# EAGLE board Qwiic Environmental BME680-Panel (EAGLE 9.6.0), part 1 of 4
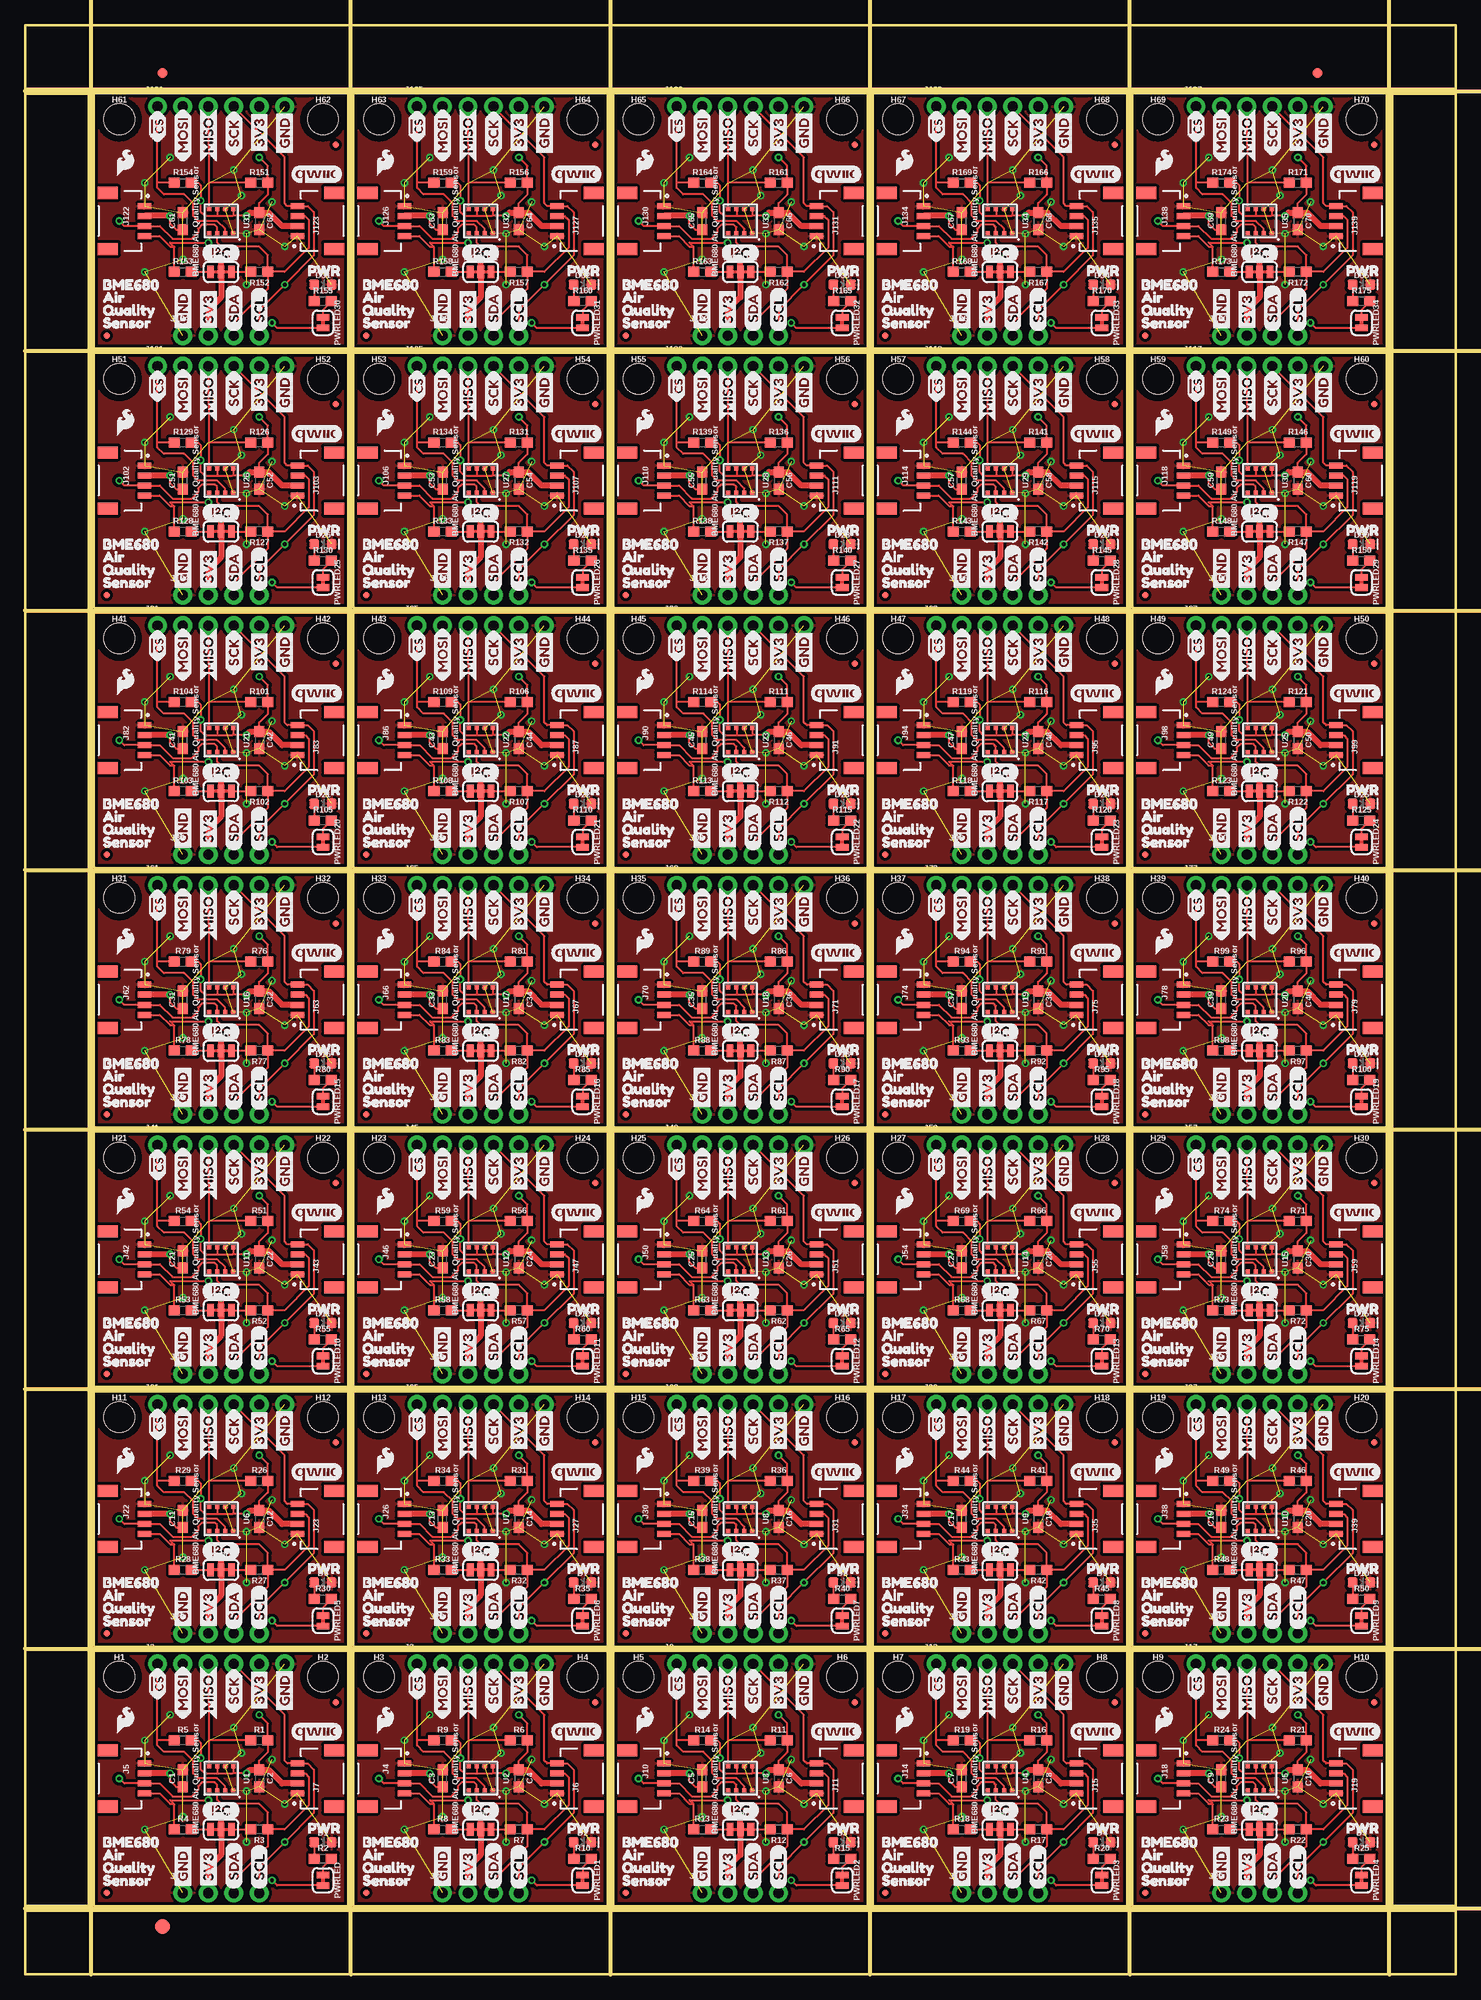
[diagram p0: board, top side]
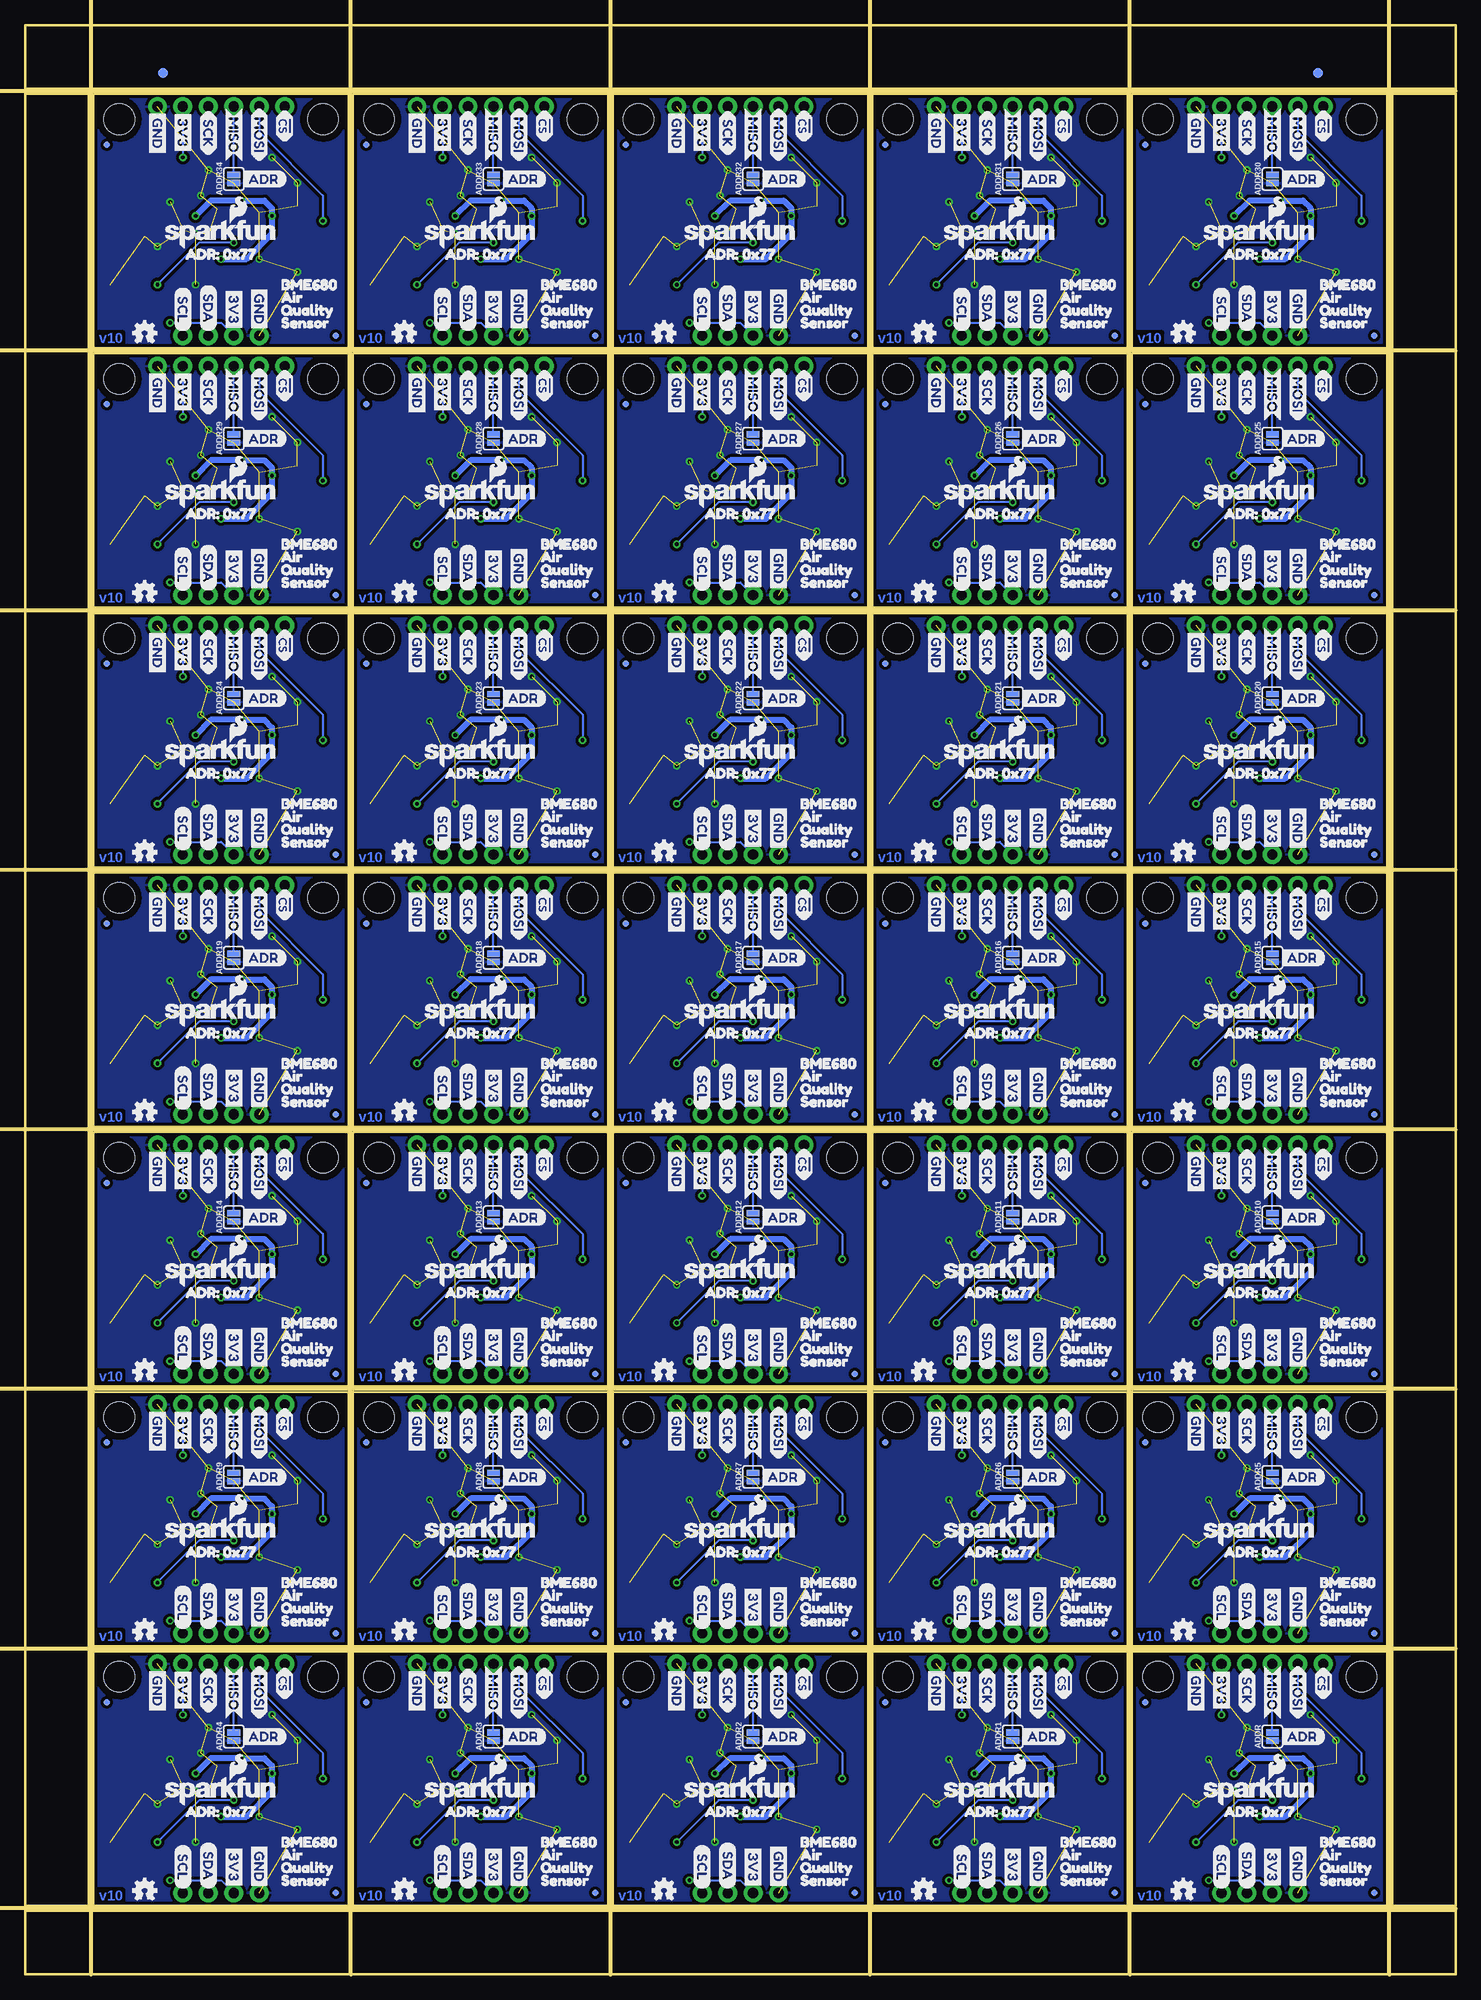
[diagram p1: board, bottom side, seen from below]

Size 142.75 x 194.56 mm. Coordinates in mm from the lower left corner, seen from the top.
Outline: 6.86,6.86 32.26,6.86 32.26,32.26 6.86,32.26 6.86,6.86
Outline: 32.77,6.86 58.17,6.86 58.17,32.26 32.77,32.26 32.77,6.86
Outline: 58.67,6.86 84.07,6.86 84.07,32.26 58.67,32.26 58.67,6.86
Outline: 84.58,6.86 109.98,6.86 109.98,32.26 84.58,32.26 84.58,6.86
Outline: 110.49,6.86 135.89,6.86 135.89,32.26 110.49,32.26 110.49,6.86
Outline: 6.86,32.77 32.26,32.77 32.26,58.17 6.86,58.17 6.86,32.77
Outline: 32.77,32.77 58.17,32.77 58.17,58.17 32.77,58.17 32.77,32.77
Outline: 58.67,32.77 84.07,32.77 84.07,58.17 58.67,58.17 58.67,32.77
Outline: 84.58,32.77 109.98,32.77 109.98,58.17 84.58,58.17 84.58,32.77
Outline: 110.49,32.77 135.89,32.77 135.89,58.17 110.49,58.17 110.49,32.77
Outline: 6.86,58.67 32.26,58.67 32.26,84.07 6.86,84.07 6.86,58.67
Outline: 32.77,58.67 58.17,58.67 58.17,84.07 32.77,84.07 32.77,58.67
Outline: 58.67,58.67 84.07,58.67 84.07,84.07 58.67,84.07 58.67,58.67
Outline: 84.58,58.67 109.98,58.67 109.98,84.07 84.58,84.07 84.58,58.67
Outline: 110.49,58.67 135.89,58.67 135.89,84.07 110.49,84.07 110.49,58.67
Outline: 6.86,84.58 32.26,84.58 32.26,109.98 6.86,109.98 6.86,84.58
Outline: 32.77,84.58 58.17,84.58 58.17,109.98 32.77,109.98 32.77,84.58
Outline: 58.67,84.58 84.07,84.58 84.07,109.98 58.67,109.98 58.67,84.58
Outline: 84.58,84.58 109.98,84.58 109.98,109.98 84.58,109.98 84.58,84.58
Outline: 110.49,84.58 135.89,84.58 135.89,109.98 110.49,109.98 110.49,84.58
Outline: 6.86,110.49 32.26,110.49 32.26,135.89 6.86,135.89 6.86,110.49
Outline: 32.77,110.49 58.17,110.49 58.17,135.89 32.77,135.89 32.77,110.49
Outline: 58.67,110.49 84.07,110.49 84.07,135.89 58.67,135.89 58.67,110.49
Outline: 84.58,110.49 109.98,110.49 109.98,135.89 84.58,135.89 84.58,110.49
Outline: 110.49,110.49 135.89,110.49 135.89,135.89 110.49,135.89 110.49,110.49
Outline: 6.86,136.4 32.26,136.4 32.26,161.8 6.86,161.8 6.86,136.4
Outline: 32.77,136.4 58.17,136.4 58.17,161.8 32.77,161.8 32.77,136.4
Outline: 58.67,136.4 84.07,136.4 84.07,161.8 58.67,161.8 58.67,136.4
Outline: 84.58,136.4 109.98,136.4 109.98,161.8 84.58,161.8 84.58,136.4
Outline: 110.49,136.4 135.89,136.4 135.89,161.8 110.49,161.8 110.49,136.4
Outline: 6.86,162.31 32.26,162.31 32.26,187.71 6.86,187.71 6.86,162.31
Outline: 32.77,162.31 58.17,162.31 58.17,187.71 32.77,187.71 32.77,162.31
Outline: 58.67,162.31 84.07,162.31 84.07,187.71 58.67,187.71 58.67,162.31
Outline: 84.58,162.31 109.98,162.31 109.98,187.71 84.58,187.71 84.58,162.31
Outline: 110.49,162.31 135.89,162.31 135.89,187.71 110.49,187.71 110.49,162.31
Outline: 0,6.35 142.75,6.35 142.75,0 0,0 0,6.35
Outline: 136.4,187.71 142.75,187.71 142.75,6.86 136.4,6.86 136.4,187.71
Outline: 0,194.56 142.75,194.56 142.75,188.21 0,188.21 0,194.56
Outline: 0,187.71 6.35,187.71 6.35,6.86 0,6.86 0,187.71
Copper layers (1*16): Top 0.035mm / dielectric 1.5mm / Bottom 0.035mm
Design rules "Qwiic": minimum track width 7mil, minimum drill 15mil, track to track 7mil, track to pad 7mil, pad to pad 7mil, via to via 7mil, smd to smd 7mil, copper to edge 7mil, drill to drill 7mil, minimum pad ring 7mil, minimum via ring 7mil, stop-mask expansion 4mil, vias tented up to drill 25mil, thermal gap 10mil
Milling: 14 lines

## Footprints (pad centres in the part's own frame; a part is rotated, then mirrored left to right if it is on the bottom)
SMT-JUMPER_2_NO_SILK = smd 0.635 x 1.27: 1 -0.406,0; 2 0.406,0
0603 = smd 1.1 x 1: 1 -0.85,0; 2 0.85,0
LED-0603 = smd 1 x 1: A -0.877,0; C 0.877,0
FIDUCIAL-1X2 = smd 1 x 1: 1 0,0
FIDUCIAL-1.5X3 = smd 1.5 x 1.5: 1 0,0
FIDUCIAL-MICRO = smd 0.635 x 0.635: 1 0,0
STAND-OFF-TIGHT = hole 3.048: 0,0
SMT-JUMPER_3_2-NC_TRACE_SILK = smd 0.66 x 1.27: 1 -1.041,0; 2 0,0; 3 1.041,0
1X04_NO_SILK = drill 1.016 pad 1.88: 1 0,0; 2 2.54,0; 3 5.08,0; 4 7.62,0
1X06_NO_SILK = drill 1.016 pad 1.88: 1 0,0; 2 2.54,0; 3 5.08,0; 4 7.62,0; 5 10.16,0; 6 12.7,0
JST04_1MM_RA = smd 0.6 x 1.35: 1 -1.5,0; 2 -0.5,0; 3 0.5,0; 4 1.5,0 | smd 1.2 x 2: NC1 2.8,-3.675; NC2 -2.8,-3.675
SMT-JUMPER_2_NC_TRACE_SILK = smd 0.66 x 1.27: 1 -0.521,0; 2 0.521,0
0603@1 = smd 1.1 x 1: 1 -0.85,0; 2 0.85,0
LGA3.0X3.0 = smd 0.4 x 0.4: 1 1.2,1.2; 2 1.2,0.4; 3 1.2,-0.4; 4 1.2,-1.2; 5 -1.2,-1.2; 6 -1.2,-0.4; 7 -1.2,0.4; 8 -1.2,1.2

## Placement (x,y rotation side)
ADDR  JUMPER-SMT_2_NO_SILK  [SMT-JUMPER_2_NO_SILK]  18.29,23.75 90 bottom
ADDR1  JUMPER-SMT_2_NO_SILK  [SMT-JUMPER_2_NO_SILK]  44.2,23.75 90 bottom
ADDR2  JUMPER-SMT_2_NO_SILK  [SMT-JUMPER_2_NO_SILK]  70.1,23.75 90 bottom
ADDR3  JUMPER-SMT_2_NO_SILK  [SMT-JUMPER_2_NO_SILK]  96.01,23.75 90 bottom
ADDR4  JUMPER-SMT_2_NO_SILK  [SMT-JUMPER_2_NO_SILK]  121.92,23.75 90 bottom
ADDR5  JUMPER-SMT_2_NO_SILK  [SMT-JUMPER_2_NO_SILK]  18.29,49.66 90 bottom
ADDR6  JUMPER-SMT_2_NO_SILK  [SMT-JUMPER_2_NO_SILK]  44.2,49.66 90 bottom
ADDR7  JUMPER-SMT_2_NO_SILK  [SMT-JUMPER_2_NO_SILK]  70.1,49.66 90 bottom
ADDR8  JUMPER-SMT_2_NO_SILK  [SMT-JUMPER_2_NO_SILK]  96.01,49.66 90 bottom
ADDR9  JUMPER-SMT_2_NO_SILK  [SMT-JUMPER_2_NO_SILK]  121.92,49.66 90 bottom
ADDR10  JUMPER-SMT_2_NO_SILK  [SMT-JUMPER_2_NO_SILK]  18.29,75.56 90 bottom
ADDR11  JUMPER-SMT_2_NO_SILK  [SMT-JUMPER_2_NO_SILK]  44.2,75.56 90 bottom
ADDR12  JUMPER-SMT_2_NO_SILK  [SMT-JUMPER_2_NO_SILK]  70.1,75.56 90 bottom
ADDR13  JUMPER-SMT_2_NO_SILK  [SMT-JUMPER_2_NO_SILK]  96.01,75.56 90 bottom
ADDR14  JUMPER-SMT_2_NO_SILK  [SMT-JUMPER_2_NO_SILK]  121.92,75.56 90 bottom
ADDR15  JUMPER-SMT_2_NO_SILK  [SMT-JUMPER_2_NO_SILK]  18.29,101.47 90 bottom
ADDR16  JUMPER-SMT_2_NO_SILK  [SMT-JUMPER_2_NO_SILK]  44.2,101.47 90 bottom
ADDR17  JUMPER-SMT_2_NO_SILK  [SMT-JUMPER_2_NO_SILK]  70.1,101.47 90 bottom
ADDR18  JUMPER-SMT_2_NO_SILK  [SMT-JUMPER_2_NO_SILK]  96.01,101.47 90 bottom
ADDR19  JUMPER-SMT_2_NO_SILK  [SMT-JUMPER_2_NO_SILK]  121.92,101.47 90 bottom
ADDR20  JUMPER-SMT_2_NO_SILK  [SMT-JUMPER_2_NO_SILK]  18.29,127.38 90 bottom
ADDR21  JUMPER-SMT_2_NO_SILK  [SMT-JUMPER_2_NO_SILK]  44.2,127.38 90 bottom
ADDR22  JUMPER-SMT_2_NO_SILK  [SMT-JUMPER_2_NO_SILK]  70.1,127.38 90 bottom
ADDR23  JUMPER-SMT_2_NO_SILK  [SMT-JUMPER_2_NO_SILK]  96.01,127.38 90 bottom
ADDR24  JUMPER-SMT_2_NO_SILK  [SMT-JUMPER_2_NO_SILK]  121.92,127.38 90 bottom
ADDR25  JUMPER-SMT_2_NO_SILK  [SMT-JUMPER_2_NO_SILK]  18.29,153.29 90 bottom
ADDR26  JUMPER-SMT_2_NO_SILK  [SMT-JUMPER_2_NO_SILK]  44.2,153.29 90 bottom
ADDR27  JUMPER-SMT_2_NO_SILK  [SMT-JUMPER_2_NO_SILK]  70.1,153.29 90 bottom
ADDR28  JUMPER-SMT_2_NO_SILK  [SMT-JUMPER_2_NO_SILK]  96.01,153.29 90 bottom
ADDR29  JUMPER-SMT_2_NO_SILK  [SMT-JUMPER_2_NO_SILK]  121.92,153.29 90 bottom
ADDR30  JUMPER-SMT_2_NO_SILK  [SMT-JUMPER_2_NO_SILK]  18.29,179.2 90 bottom
ADDR31  JUMPER-SMT_2_NO_SILK  [SMT-JUMPER_2_NO_SILK]  44.2,179.2 90 bottom
ADDR32  JUMPER-SMT_2_NO_SILK  [SMT-JUMPER_2_NO_SILK]  70.1,179.2 90 bottom
ADDR33  JUMPER-SMT_2_NO_SILK  [SMT-JUMPER_2_NO_SILK]  96.01,179.2 90 bottom
ADDR34  JUMPER-SMT_2_NO_SILK  [SMT-JUMPER_2_NO_SILK]  121.92,179.2 90 bottom
C1  0.1uF  [0603]  15.75,19.56 90 top
C2  0.1uF  [0603]  23.37,19.56 270 top
C3  0.1uF  [0603]  41.66,19.56 90 top
C4  0.1uF  [0603]  49.28,19.56 270 top
C5  0.1uF  [0603]  67.56,19.56 90 top
C6  0.1uF  [0603]  75.18,19.56 270 top
C7  0.1uF  [0603]  93.47,19.56 90 top
C8  0.1uF  [0603]  101.09,19.56 270 top
C9  0.1uF  [0603]  119.38,19.56 90 top
C10  0.1uF  [0603]  127,19.56 270 top
C11  0.1uF  [0603]  15.75,45.47 90 top
C12  0.1uF  [0603]  23.37,45.47 270 top
C13  0.1uF  [0603]  41.66,45.47 90 top
C14  0.1uF  [0603]  49.28,45.47 270 top
C15  0.1uF  [0603]  67.56,45.47 90 top
C16  0.1uF  [0603]  75.18,45.47 270 top
C17  0.1uF  [0603]  93.47,45.47 90 top
C18  0.1uF  [0603]  101.09,45.47 270 top
C19  0.1uF  [0603]  119.38,45.47 90 top
C20  0.1uF  [0603]  127,45.47 270 top
C21  0.1uF  [0603]  15.75,71.37 90 top
C22  0.1uF  [0603]  23.37,71.37 270 top
C23  0.1uF  [0603]  41.66,71.37 90 top
C24  0.1uF  [0603]  49.28,71.37 270 top
C25  0.1uF  [0603]  67.56,71.37 90 top
C26  0.1uF  [0603]  75.18,71.37 270 top
C27  0.1uF  [0603]  93.47,71.37 90 top
C28  0.1uF  [0603]  101.09,71.37 270 top
C29  0.1uF  [0603]  119.38,71.37 90 top
C30  0.1uF  [0603]  127,71.37 270 top
C31  0.1uF  [0603]  15.75,97.28 90 top
C32  0.1uF  [0603]  23.37,97.28 270 top
C33  0.1uF  [0603]  41.66,97.28 90 top
C34  0.1uF  [0603]  49.28,97.28 270 top
C35  0.1uF  [0603]  67.56,97.28 90 top
C36  0.1uF  [0603]  75.18,97.28 270 top
C37  0.1uF  [0603]  93.47,97.28 90 top
C38  0.1uF  [0603]  101.09,97.28 270 top
C39  0.1uF  [0603]  119.38,97.28 90 top
C40  0.1uF  [0603]  127,97.28 270 top
C41  0.1uF  [0603]  15.75,123.19 90 top
C42  0.1uF  [0603]  23.37,123.19 270 top
C43  0.1uF  [0603]  41.66,123.19 90 top
C44  0.1uF  [0603]  49.28,123.19 270 top
C45  0.1uF  [0603]  67.56,123.19 90 top
C46  0.1uF  [0603]  75.18,123.19 270 top
C47  0.1uF  [0603]  93.47,123.19 90 top
C48  0.1uF  [0603]  101.09,123.19 270 top
C49  0.1uF  [0603]  119.38,123.19 90 top
C50  0.1uF  [0603]  127,123.19 270 top
C51  0.1uF  [0603]  15.75,149.1 90 top
C52  0.1uF  [0603]  23.37,149.1 270 top
C53  0.1uF  [0603]  41.66,149.1 90 top
C54  0.1uF  [0603]  49.28,149.1 270 top
C55  0.1uF  [0603]  67.56,149.1 90 top
C56  0.1uF  [0603]  75.18,149.1 270 top
C57  0.1uF  [0603]  93.47,149.1 90 top
C58  0.1uF  [0603]  101.09,149.1 270 top
C59  0.1uF  [0603]  119.38,149.1 90 top
C60  0.1uF  [0603]  127,149.1 270 top
C61  0.1uF  [0603]  15.75,175.01 90 top
C62  0.1uF  [0603]  23.37,175.01 270 top
C63  0.1uF  [0603]  41.66,175.01 90 top
C64  0.1uF  [0603]  49.28,175.01 270 top
C65  0.1uF  [0603]  67.56,175.01 90 top
C66  0.1uF  [0603]  75.18,175.01 270 top
C67  0.1uF  [0603]  93.47,175.01 90 top
C68  0.1uF  [0603]  101.09,175.01 270 top
C69  0.1uF  [0603]  119.38,175.01 90 top
C70  0.1uF  [0603]  127,175.01 270 top
D1  RED  [LED-0603]  29.72,13.21 0 top
D2  RED  [LED-0603]  55.63,13.21 0 top
D3  RED  [LED-0603]  81.53,13.21 0 top
D4  RED  [LED-0603]  107.44,13.21 0 top
D5  RED  [LED-0603]  133.35,13.21 0 top
D6  RED  [LED-0603]  29.72,39.12 0 top
D7  RED  [LED-0603]  55.63,39.12 0 top
D8  RED  [LED-0603]  81.53,39.12 0 top
D9  RED  [LED-0603]  107.44,39.12 0 top
D10  RED  [LED-0603]  133.35,39.12 0 top
D11  RED  [LED-0603]  29.72,65.02 0 top
D12  RED  [LED-0603]  55.63,65.02 0 top
D13  RED  [LED-0603]  81.53,65.02 0 top
D14  RED  [LED-0603]  107.44,65.02 0 top
D15  RED  [LED-0603]  133.35,65.02 0 top
D16  RED  [LED-0603]  29.72,90.93 0 top
D17  RED  [LED-0603]  55.63,90.93 0 top
D18  RED  [LED-0603]  81.53,90.93 0 top
D19  RED  [LED-0603]  107.44,90.93 0 top
D20  RED  [LED-0603]  133.35,90.93 0 top
D21  RED  [LED-0603]  29.72,116.84 0 top
D22  RED  [LED-0603]  55.63,116.84 0 top
D23  RED  [LED-0603]  81.53,116.84 0 top
D24  RED  [LED-0603]  107.44,116.84 0 top
D25  RED  [LED-0603]  133.35,116.84 0 top
D26  RED  [LED-0603]  29.72,142.75 0 top
D27  RED  [LED-0603]  55.63,142.75 0 top
D28  RED  [LED-0603]  81.53,142.75 0 top
D29  RED  [LED-0603]  107.44,142.75 0 top
D30  RED  [LED-0603]  133.35,142.75 0 top
D31  RED  [LED-0603]  29.72,168.66 0 top
D32  RED  [LED-0603]  55.63,168.66 0 top
D33  RED  [LED-0603]  81.53,168.66 0 top
D34  RED  [LED-0603]  107.44,168.66 0 top
D35  RED  [LED-0603]  133.35,168.66 0 top
E$1  [FIDUCIAL-1X2]  13.72,189.8 0 top
E$2  [FIDUCIAL-1X2]  13.72,189.8 0 bottom
E$3  [FIDUCIAL-1X2]  128.97,189.8 0 top
E$4  [FIDUCIAL-1X2]  128.97,189.8 0 bottom
E$5  [FIDUCIAL-1.5X3]  13.72,4.76 0 top
FD1  FIDUCIALUFIDUCIAL  [FIDUCIAL-MICRO]  30.99,27.18 0 top
FD2  FIDUCIALUFIDUCIAL  [FIDUCIAL-MICRO]  30.99,27.18 0 bottom
FD3  FIDUCIALUFIDUCIAL  [FIDUCIAL-MICRO]  8.13,8.13 0 bottom
FD4  FIDUCIALUFIDUCIAL  [FIDUCIAL-MICRO]  8.13,8.13 0 top
FD5  FIDUCIALUFIDUCIAL  [FIDUCIAL-MICRO]  56.9,27.18 0 top
FD6  FIDUCIALUFIDUCIAL  [FIDUCIAL-MICRO]  34.04,8.13 0 bottom
FD7  FIDUCIALUFIDUCIAL  [FIDUCIAL-MICRO]  56.9,27.18 0 bottom
FD8  FIDUCIALUFIDUCIAL  [FIDUCIAL-MICRO]  34.04,8.13 0 top
FD9  FIDUCIALUFIDUCIAL  [FIDUCIAL-MICRO]  82.8,27.18 0 top
FD10  FIDUCIALUFIDUCIAL  [FIDUCIAL-MICRO]  59.94,8.13 0 bottom
FD11  FIDUCIALUFIDUCIAL  [FIDUCIAL-MICRO]  82.8,27.18 0 bottom
FD12  FIDUCIALUFIDUCIAL  [FIDUCIAL-MICRO]  59.94,8.13 0 top
FD13  FIDUCIALUFIDUCIAL  [FIDUCIAL-MICRO]  108.71,27.18 0 top
FD14  FIDUCIALUFIDUCIAL  [FIDUCIAL-MICRO]  85.85,8.13 0 bottom
FD15  FIDUCIALUFIDUCIAL  [FIDUCIAL-MICRO]  108.71,27.18 0 bottom
FD16  FIDUCIALUFIDUCIAL  [FIDUCIAL-MICRO]  85.85,8.13 0 top
FD17  FIDUCIALUFIDUCIAL  [FIDUCIAL-MICRO]  134.62,27.18 0 top
FD18  FIDUCIALUFIDUCIAL  [FIDUCIAL-MICRO]  111.76,8.13 0 bottom
FD19  FIDUCIALUFIDUCIAL  [FIDUCIAL-MICRO]  134.62,27.18 0 bottom
FD20  FIDUCIALUFIDUCIAL  [FIDUCIAL-MICRO]  111.76,8.13 0 top
FD21  FIDUCIALUFIDUCIAL  [FIDUCIAL-MICRO]  30.99,53.09 0 top
FD22  FIDUCIALUFIDUCIAL  [FIDUCIAL-MICRO]  8.13,34.04 0 bottom
FD23  FIDUCIALUFIDUCIAL  [FIDUCIAL-MICRO]  30.99,53.09 0 bottom
FD24  FIDUCIALUFIDUCIAL  [FIDUCIAL-MICRO]  8.13,34.04 0 top
FD25  FIDUCIALUFIDUCIAL  [FIDUCIAL-MICRO]  56.9,53.09 0 top
FD26  FIDUCIALUFIDUCIAL  [FIDUCIAL-MICRO]  34.04,34.04 0 bottom
FD27  FIDUCIALUFIDUCIAL  [FIDUCIAL-MICRO]  56.9,53.09 0 bottom
FD28  FIDUCIALUFIDUCIAL  [FIDUCIAL-MICRO]  34.04,34.04 0 top
FD29  FIDUCIALUFIDUCIAL  [FIDUCIAL-MICRO]  82.8,53.09 0 top
FD30  FIDUCIALUFIDUCIAL  [FIDUCIAL-MICRO]  59.94,34.04 0 bottom
FD31  FIDUCIALUFIDUCIAL  [FIDUCIAL-MICRO]  82.8,53.09 0 bottom
FD32  FIDUCIALUFIDUCIAL  [FIDUCIAL-MICRO]  59.94,34.04 0 top
FD33  FIDUCIALUFIDUCIAL  [FIDUCIAL-MICRO]  108.71,53.09 0 top
FD34  FIDUCIALUFIDUCIAL  [FIDUCIAL-MICRO]  85.85,34.04 0 bottom
FD35  FIDUCIALUFIDUCIAL  [FIDUCIAL-MICRO]  108.71,53.09 0 bottom
FD36  FIDUCIALUFIDUCIAL  [FIDUCIAL-MICRO]  85.85,34.04 0 top
FD37  FIDUCIALUFIDUCIAL  [FIDUCIAL-MICRO]  134.62,53.09 0 top
FD38  FIDUCIALUFIDUCIAL  [FIDUCIAL-MICRO]  111.76,34.04 0 bottom
FD39  FIDUCIALUFIDUCIAL  [FIDUCIAL-MICRO]  134.62,53.09 0 bottom
FD40  FIDUCIALUFIDUCIAL  [FIDUCIAL-MICRO]  111.76,34.04 0 top
FD41  FIDUCIALUFIDUCIAL  [FIDUCIAL-MICRO]  30.99,78.99 0 top
FD42  FIDUCIALUFIDUCIAL  [FIDUCIAL-MICRO]  8.13,59.94 0 bottom
FD43  FIDUCIALUFIDUCIAL  [FIDUCIAL-MICRO]  30.99,78.99 0 bottom
FD44  FIDUCIALUFIDUCIAL  [FIDUCIAL-MICRO]  8.13,59.94 0 top
FD45  FIDUCIALUFIDUCIAL  [FIDUCIAL-MICRO]  56.9,78.99 0 top
FD46  FIDUCIALUFIDUCIAL  [FIDUCIAL-MICRO]  34.04,59.94 0 bottom
FD47  FIDUCIALUFIDUCIAL  [FIDUCIAL-MICRO]  56.9,78.99 0 bottom
FD48  FIDUCIALUFIDUCIAL  [FIDUCIAL-MICRO]  34.04,59.94 0 top
FD49  FIDUCIALUFIDUCIAL  [FIDUCIAL-MICRO]  82.8,78.99 0 top
FD50  FIDUCIALUFIDUCIAL  [FIDUCIAL-MICRO]  59.94,59.94 0 bottom
FD51  FIDUCIALUFIDUCIAL  [FIDUCIAL-MICRO]  82.8,78.99 0 bottom
FD52  FIDUCIALUFIDUCIAL  [FIDUCIAL-MICRO]  59.94,59.94 0 top
FD53  FIDUCIALUFIDUCIAL  [FIDUCIAL-MICRO]  108.71,78.99 0 top
FD54  FIDUCIALUFIDUCIAL  [FIDUCIAL-MICRO]  85.85,59.94 0 bottom
FD55  FIDUCIALUFIDUCIAL  [FIDUCIAL-MICRO]  108.71,78.99 0 bottom
FD56  FIDUCIALUFIDUCIAL  [FIDUCIAL-MICRO]  85.85,59.94 0 top
FD57  FIDUCIALUFIDUCIAL  [FIDUCIAL-MICRO]  134.62,78.99 0 top
FD58  FIDUCIALUFIDUCIAL  [FIDUCIAL-MICRO]  111.76,59.94 0 bottom
FD59  FIDUCIALUFIDUCIAL  [FIDUCIAL-MICRO]  134.62,78.99 0 bottom
FD60  FIDUCIALUFIDUCIAL  [FIDUCIAL-MICRO]  111.76,59.94 0 top
FD61  FIDUCIALUFIDUCIAL  [FIDUCIAL-MICRO]  30.99,104.9 0 top
FD62  FIDUCIALUFIDUCIAL  [FIDUCIAL-MICRO]  8.13,85.85 0 bottom
FD63  FIDUCIALUFIDUCIAL  [FIDUCIAL-MICRO]  30.99,104.9 0 bottom
FD64  FIDUCIALUFIDUCIAL  [FIDUCIAL-MICRO]  8.13,85.85 0 top
FD65  FIDUCIALUFIDUCIAL  [FIDUCIAL-MICRO]  56.9,104.9 0 top
FD66  FIDUCIALUFIDUCIAL  [FIDUCIAL-MICRO]  34.04,85.85 0 bottom
FD67  FIDUCIALUFIDUCIAL  [FIDUCIAL-MICRO]  56.9,104.9 0 bottom
FD68  FIDUCIALUFIDUCIAL  [FIDUCIAL-MICRO]  34.04,85.85 0 top
FD69  FIDUCIALUFIDUCIAL  [FIDUCIAL-MICRO]  82.8,104.9 0 top
FD70  FIDUCIALUFIDUCIAL  [FIDUCIAL-MICRO]  59.94,85.85 0 bottom
FD71  FIDUCIALUFIDUCIAL  [FIDUCIAL-MICRO]  82.8,104.9 0 bottom
FD72  FIDUCIALUFIDUCIAL  [FIDUCIAL-MICRO]  59.94,85.85 0 top
FD73  FIDUCIALUFIDUCIAL  [FIDUCIAL-MICRO]  108.71,104.9 0 top
FD74  FIDUCIALUFIDUCIAL  [FIDUCIAL-MICRO]  85.85,85.85 0 bottom
FD75  FIDUCIALUFIDUCIAL  [FIDUCIAL-MICRO]  108.71,104.9 0 bottom
FD76  FIDUCIALUFIDUCIAL  [FIDUCIAL-MICRO]  85.85,85.85 0 top
FD77  FIDUCIALUFIDUCIAL  [FIDUCIAL-MICRO]  134.62,104.9 0 top
FD78  FIDUCIALUFIDUCIAL  [FIDUCIAL-MICRO]  111.76,85.85 0 bottom
FD79  FIDUCIALUFIDUCIAL  [FIDUCIAL-MICRO]  134.62,104.9 0 bottom
FD80  FIDUCIALUFIDUCIAL  [FIDUCIAL-MICRO]  111.76,85.85 0 top
FD81  FIDUCIALUFIDUCIAL  [FIDUCIAL-MICRO]  30.99,130.81 0 top
FD82  FIDUCIALUFIDUCIAL  [FIDUCIAL-MICRO]  8.13,111.76 0 bottom
FD83  FIDUCIALUFIDUCIAL  [FIDUCIAL-MICRO]  30.99,130.81 0 bottom
FD84  FIDUCIALUFIDUCIAL  [FIDUCIAL-MICRO]  8.13,111.76 0 top
FD85  FIDUCIALUFIDUCIAL  [FIDUCIAL-MICRO]  56.9,130.81 0 top
FD86  FIDUCIALUFIDUCIAL  [FIDUCIAL-MICRO]  34.04,111.76 0 bottom
FD87  FIDUCIALUFIDUCIAL  [FIDUCIAL-MICRO]  56.9,130.81 0 bottom
FD88  FIDUCIALUFIDUCIAL  [FIDUCIAL-MICRO]  34.04,111.76 0 top
FD89  FIDUCIALUFIDUCIAL  [FIDUCIAL-MICRO]  82.8,130.81 0 top
FD90  FIDUCIALUFIDUCIAL  [FIDUCIAL-MICRO]  59.94,111.76 0 bottom
FD91  FIDUCIALUFIDUCIAL  [FIDUCIAL-MICRO]  82.8,130.81 0 bottom
FD92  FIDUCIALUFIDUCIAL  [FIDUCIAL-MICRO]  59.94,111.76 0 top
FD93  FIDUCIALUFIDUCIAL  [FIDUCIAL-MICRO]  108.71,130.81 0 top
FD94  FIDUCIALUFIDUCIAL  [FIDUCIAL-MICRO]  85.85,111.76 0 bottom
FD95  FIDUCIALUFIDUCIAL  [FIDUCIAL-MICRO]  108.71,130.81 0 bottom
FD96  FIDUCIALUFIDUCIAL  [FIDUCIAL-MICRO]  85.85,111.76 0 top
FD97  FIDUCIALUFIDUCIAL  [FIDUCIAL-MICRO]  134.62,130.81 0 top
FD98  FIDUCIALUFIDUCIAL  [FIDUCIAL-MICRO]  111.76,111.76 0 bottom
FD99  FIDUCIALUFIDUCIAL  [FIDUCIAL-MICRO]  134.62,130.81 0 bottom
FD100  FIDUCIALUFIDUCIAL  [FIDUCIAL-MICRO]  111.76,111.76 0 top
FD101  FIDUCIALUFIDUCIAL  [FIDUCIAL-MICRO]  30.99,156.72 0 top
FD102  FIDUCIALUFIDUCIAL  [FIDUCIAL-MICRO]  8.13,137.67 0 bottom
FD103  FIDUCIALUFIDUCIAL  [FIDUCIAL-MICRO]  30.99,156.72 0 bottom
FD104  FIDUCIALUFIDUCIAL  [FIDUCIAL-MICRO]  8.13,137.67 0 top
FD105  FIDUCIALUFIDUCIAL  [FIDUCIAL-MICRO]  56.9,156.72 0 top
FD106  FIDUCIALUFIDUCIAL  [FIDUCIAL-MICRO]  34.04,137.67 0 bottom
FD107  FIDUCIALUFIDUCIAL  [FIDUCIAL-MICRO]  56.9,156.72 0 bottom
FD108  FIDUCIALUFIDUCIAL  [FIDUCIAL-MICRO]  34.04,137.67 0 top
FD109  FIDUCIALUFIDUCIAL  [FIDUCIAL-MICRO]  82.8,156.72 0 top
FD110  FIDUCIALUFIDUCIAL  [FIDUCIAL-MICRO]  59.94,137.67 0 bottom
FD111  FIDUCIALUFIDUCIAL  [FIDUCIAL-MICRO]  82.8,156.72 0 bottom
FD112  FIDUCIALUFIDUCIAL  [FIDUCIAL-MICRO]  59.94,137.67 0 top
FD113  FIDUCIALUFIDUCIAL  [FIDUCIAL-MICRO]  108.71,156.72 0 top
FD114  FIDUCIALUFIDUCIAL  [FIDUCIAL-MICRO]  85.85,137.67 0 bottom
FD115  FIDUCIALUFIDUCIAL  [FIDUCIAL-MICRO]  108.71,156.72 0 bottom
FD116  FIDUCIALUFIDUCIAL  [FIDUCIAL-MICRO]  85.85,137.67 0 top
FD117  FIDUCIALUFIDUCIAL  [FIDUCIAL-MICRO]  134.62,156.72 0 top
FD118  FIDUCIALUFIDUCIAL  [FIDUCIAL-MICRO]  111.76,137.67 0 bottom
FD119  FIDUCIALUFIDUCIAL  [FIDUCIAL-MICRO]  134.62,156.72 0 bottom
FD120  FIDUCIALUFIDUCIAL  [FIDUCIAL-MICRO]  111.76,137.67 0 top
FD121  FIDUCIALUFIDUCIAL  [FIDUCIAL-MICRO]  30.99,182.63 0 top
FD122  FIDUCIALUFIDUCIAL  [FIDUCIAL-MICRO]  8.13,163.58 0 bottom
FD123  FIDUCIALUFIDUCIAL  [FIDUCIAL-MICRO]  30.99,182.63 0 bottom
FD124  FIDUCIALUFIDUCIAL  [FIDUCIAL-MICRO]  8.13,163.58 0 top
FD125  FIDUCIALUFIDUCIAL  [FIDUCIAL-MICRO]  56.9,182.63 0 top
FD126  FIDUCIALUFIDUCIAL  [FIDUCIAL-MICRO]  34.04,163.58 0 bottom
FD127  FIDUCIALUFIDUCIAL  [FIDUCIAL-MICRO]  56.9,182.63 0 bottom
FD128  FIDUCIALUFIDUCIAL  [FIDUCIAL-MICRO]  34.04,163.58 0 top
FD129  FIDUCIALUFIDUCIAL  [FIDUCIAL-MICRO]  82.8,182.63 0 top
FD130  FIDUCIALUFIDUCIAL  [FIDUCIAL-MICRO]  59.94,163.58 0 bottom
FD131  FIDUCIALUFIDUCIAL  [FIDUCIAL-MICRO]  82.8,182.63 0 bottom
FD132  FIDUCIALUFIDUCIAL  [FIDUCIAL-MICRO]  59.94,163.58 0 top
FD133  FIDUCIALUFIDUCIAL  [FIDUCIAL-MICRO]  108.71,182.63 0 top
FD134  FIDUCIALUFIDUCIAL  [FIDUCIAL-MICRO]  85.85,163.58 0 bottom
FD135  FIDUCIALUFIDUCIAL  [FIDUCIAL-MICRO]  108.71,182.63 0 bottom
FD136  FIDUCIALUFIDUCIAL  [FIDUCIAL-MICRO]  85.85,163.58 0 top
FD137  FIDUCIALUFIDUCIAL  [FIDUCIAL-MICRO]  134.62,182.63 0 top
FD138  FIDUCIALUFIDUCIAL  [FIDUCIAL-MICRO]  111.76,163.58 0 bottom
FD139  FIDUCIALUFIDUCIAL  [FIDUCIAL-MICRO]  134.62,182.63 0 bottom
FD140  FIDUCIALUFIDUCIAL  [FIDUCIAL-MICRO]  111.76,163.58 0 top
H1  STAND-OFFTIGHT  [STAND-OFF-TIGHT]  9.4,29.72 0 top
H2  STAND-OFFTIGHT  [STAND-OFF-TIGHT]  29.72,29.72 0 top
H3  STAND-OFFTIGHT  [STAND-OFF-TIGHT]  35.31,29.72 0 top
H4  STAND-OFFTIGHT  [STAND-OFF-TIGHT]  55.63,29.72 0 top
H5  STAND-OFFTIGHT  [STAND-OFF-TIGHT]  61.21,29.72 0 top
H6  STAND-OFFTIGHT  [STAND-OFF-TIGHT]  81.53,29.72 0 top
H7  STAND-OFFTIGHT  [STAND-OFF-TIGHT]  87.12,29.72 0 top
H8  STAND-OFFTIGHT  [STAND-OFF-TIGHT]  107.44,29.72 0 top
H9  STAND-OFFTIGHT  [STAND-OFF-TIGHT]  113.03,29.72 0 top
H10  STAND-OFFTIGHT  [STAND-OFF-TIGHT]  133.35,29.72 0 top
H11  STAND-OFFTIGHT  [STAND-OFF-TIGHT]  9.4,55.63 0 top
H12  STAND-OFFTIGHT  [STAND-OFF-TIGHT]  29.72,55.63 0 top
H13  STAND-OFFTIGHT  [STAND-OFF-TIGHT]  35.31,55.63 0 top
H14  STAND-OFFTIGHT  [STAND-OFF-TIGHT]  55.63,55.63 0 top
H15  STAND-OFFTIGHT  [STAND-OFF-TIGHT]  61.21,55.63 0 top
H16  STAND-OFFTIGHT  [STAND-OFF-TIGHT]  81.53,55.63 0 top
H17  STAND-OFFTIGHT  [STAND-OFF-TIGHT]  87.12,55.63 0 top
H18  STAND-OFFTIGHT  [STAND-OFF-TIGHT]  107.44,55.63 0 top
H19  STAND-OFFTIGHT  [STAND-OFF-TIGHT]  113.03,55.63 0 top
H20  STAND-OFFTIGHT  [STAND-OFF-TIGHT]  133.35,55.63 0 top
H21  STAND-OFFTIGHT  [STAND-OFF-TIGHT]  9.4,81.53 0 top
H22  STAND-OFFTIGHT  [STAND-OFF-TIGHT]  29.72,81.53 0 top
H23  STAND-OFFTIGHT  [STAND-OFF-TIGHT]  35.31,81.53 0 top
H24  STAND-OFFTIGHT  [STAND-OFF-TIGHT]  55.63,81.53 0 top
H25  STAND-OFFTIGHT  [STAND-OFF-TIGHT]  61.21,81.53 0 top
H26  STAND-OFFTIGHT  [STAND-OFF-TIGHT]  81.53,81.53 0 top
H27  STAND-OFFTIGHT  [STAND-OFF-TIGHT]  87.12,81.53 0 top
H28  STAND-OFFTIGHT  [STAND-OFF-TIGHT]  107.44,81.53 0 top
H29  STAND-OFFTIGHT  [STAND-OFF-TIGHT]  113.03,81.53 0 top
H30  STAND-OFFTIGHT  [STAND-OFF-TIGHT]  133.35,81.53 0 top
H31  STAND-OFFTIGHT  [STAND-OFF-TIGHT]  9.4,107.44 0 top
H32  STAND-OFFTIGHT  [STAND-OFF-TIGHT]  29.72,107.44 0 top
H33  STAND-OFFTIGHT  [STAND-OFF-TIGHT]  35.31,107.44 0 top
H34  STAND-OFFTIGHT  [STAND-OFF-TIGHT]  55.63,107.44 0 top
H35  STAND-OFFTIGHT  [STAND-OFF-TIGHT]  61.21,107.44 0 top
H36  STAND-OFFTIGHT  [STAND-OFF-TIGHT]  81.53,107.44 0 top
H37  STAND-OFFTIGHT  [STAND-OFF-TIGHT]  87.12,107.44 0 top
H38  STAND-OFFTIGHT  [STAND-OFF-TIGHT]  107.44,107.44 0 top
H39  STAND-OFFTIGHT  [STAND-OFF-TIGHT]  113.03,107.44 0 top
H40  STAND-OFFTIGHT  [STAND-OFF-TIGHT]  133.35,107.44 0 top
H41  STAND-OFFTIGHT  [STAND-OFF-TIGHT]  9.4,133.35 0 top
H42  STAND-OFFTIGHT  [STAND-OFF-TIGHT]  29.72,133.35 0 top
H43  STAND-OFFTIGHT  [STAND-OFF-TIGHT]  35.31,133.35 0 top
H44  STAND-OFFTIGHT  [STAND-OFF-TIGHT]  55.63,133.35 0 top
H45  STAND-OFFTIGHT  [STAND-OFF-TIGHT]  61.21,133.35 0 top
H46  STAND-OFFTIGHT  [STAND-OFF-TIGHT]  81.53,133.35 0 top
H47  STAND-OFFTIGHT  [STAND-OFF-TIGHT]  87.12,133.35 0 top
H48  STAND-OFFTIGHT  [STAND-OFF-TIGHT]  107.44,133.35 0 top
H49  STAND-OFFTIGHT  [STAND-OFF-TIGHT]  113.03,133.35 0 top
H50  STAND-OFFTIGHT  [STAND-OFF-TIGHT]  133.35,133.35 0 top
H51  STAND-OFFTIGHT  [STAND-OFF-TIGHT]  9.4,159.26 0 top
H52  STAND-OFFTIGHT  [STAND-OFF-TIGHT]  29.72,159.26 0 top
H53  STAND-OFFTIGHT  [STAND-OFF-TIGHT]  35.31,159.26 0 top
H54  STAND-OFFTIGHT  [STAND-OFF-TIGHT]  55.63,159.26 0 top
H55  STAND-OFFTIGHT  [STAND-OFF-TIGHT]  61.21,159.26 0 top
H56  STAND-OFFTIGHT  [STAND-OFF-TIGHT]  81.53,159.26 0 top
H57  STAND-OFFTIGHT  [STAND-OFF-TIGHT]  87.12,159.26 0 top
H58  STAND-OFFTIGHT  [STAND-OFF-TIGHT]  107.44,159.26 0 top
H59  STAND-OFFTIGHT  [STAND-OFF-TIGHT]  113.03,159.26 0 top
H60  STAND-OFFTIGHT  [STAND-OFF-TIGHT]  133.35,159.26 0 top
H61  STAND-OFFTIGHT  [STAND-OFF-TIGHT]  9.4,185.17 0 top
H62  STAND-OFFTIGHT  [STAND-OFF-TIGHT]  29.72,185.17 0 top
H63  STAND-OFFTIGHT  [STAND-OFF-TIGHT]  35.31,185.17 0 top
H64  STAND-OFFTIGHT  [STAND-OFF-TIGHT]  55.63,185.17 0 top
H65  STAND-OFFTIGHT  [STAND-OFF-TIGHT]  61.21,185.17 0 top
H66  STAND-OFFTIGHT  [STAND-OFF-TIGHT]  81.53,185.17 0 top
H67  STAND-OFFTIGHT  [STAND-OFF-TIGHT]  87.12,185.17 0 top
H68  STAND-OFFTIGHT  [STAND-OFF-TIGHT]  107.44,185.17 0 top
H69  STAND-OFFTIGHT  [STAND-OFF-TIGHT]  113.03,185.17 0 top
H70  STAND-OFFTIGHT  [STAND-OFF-TIGHT]  133.35,185.17 0 top
I2CPU  I2C PU  [SMT-JUMPER_3_2-NC_TRACE_SILK]  19.56,14.48 0 top
I2CPU1  I2C PU  [SMT-JUMPER_3_2-NC_TRACE_SILK]  45.47,14.48 0 top
I2CPU2  I2C PU  [SMT-JUMPER_3_2-NC_TRACE_SILK]  71.37,14.48 0 top
I2CPU3  I2C PU  [SMT-JUMPER_3_2-NC_TRACE_SILK]  97.28,14.48 0 top
I2CPU4  I2C PU  [SMT-JUMPER_3_2-NC_TRACE_SILK]  123.19,14.48 0 top
I2CPU5  I2C PU  [SMT-JUMPER_3_2-NC_TRACE_SILK]  19.56,40.39 0 top
I2CPU6  I2C PU  [SMT-JUMPER_3_2-NC_TRACE_SILK]  45.47,40.39 0 top
I2CPU7  I2C PU  [SMT-JUMPER_3_2-NC_TRACE_SILK]  71.37,40.39 0 top
I2CPU8  I2C PU  [SMT-JUMPER_3_2-NC_TRACE_SILK]  97.28,40.39 0 top
I2CPU9  I2C PU  [SMT-JUMPER_3_2-NC_TRACE_SILK]  123.19,40.39 0 top
I2CPU10  I2C PU  [SMT-JUMPER_3_2-NC_TRACE_SILK]  19.56,66.29 0 top
I2CPU11  I2C PU  [SMT-JUMPER_3_2-NC_TRACE_SILK]  45.47,66.29 0 top
I2CPU12  I2C PU  [SMT-JUMPER_3_2-NC_TRACE_SILK]  71.37,66.29 0 top
I2CPU13  I2C PU  [SMT-JUMPER_3_2-NC_TRACE_SILK]  97.28,66.29 0 top
I2CPU14  I2C PU  [SMT-JUMPER_3_2-NC_TRACE_SILK]  123.19,66.29 0 top
I2CPU15  I2C PU  [SMT-JUMPER_3_2-NC_TRACE_SILK]  19.56,92.2 0 top
I2CPU16  I2C PU  [SMT-JUMPER_3_2-NC_TRACE_SILK]  45.47,92.2 0 top
I2CPU17  I2C PU  [SMT-JUMPER_3_2-NC_TRACE_SILK]  71.37,92.2 0 top
I2CPU18  I2C PU  [SMT-JUMPER_3_2-NC_TRACE_SILK]  97.28,92.2 0 top
I2CPU19  I2C PU  [SMT-JUMPER_3_2-NC_TRACE_SILK]  123.19,92.2 0 top
I2CPU20  I2C PU  [SMT-JUMPER_3_2-NC_TRACE_SILK]  19.56,118.11 0 top
I2CPU21  I2C PU  [SMT-JUMPER_3_2-NC_TRACE_SILK]  45.47,118.11 0 top
I2CPU22  I2C PU  [SMT-JUMPER_3_2-NC_TRACE_SILK]  71.37,118.11 0 top
I2CPU23  I2C PU  [SMT-JUMPER_3_2-NC_TRACE_SILK]  97.28,118.11 0 top
I2CPU24  I2C PU  [SMT-JUMPER_3_2-NC_TRACE_SILK]  123.19,118.11 0 top
I2CPU25  I2C PU  [SMT-JUMPER_3_2-NC_TRACE_SILK]  19.56,144.02 0 top
I2CPU26  I2C PU  [SMT-JUMPER_3_2-NC_TRACE_SILK]  45.47,144.02 0 top
I2CPU27  I2C PU  [SMT-JUMPER_3_2-NC_TRACE_SILK]  71.37,144.02 0 top
I2CPU28  I2C PU  [SMT-JUMPER_3_2-NC_TRACE_SILK]  97.28,144.02 0 top
I2CPU29  I2C PU  [SMT-JUMPER_3_2-NC_TRACE_SILK]  123.19,144.02 0 top
I2CPU30  I2C PU  [SMT-JUMPER_3_2-NC_TRACE_SILK]  19.56,169.93 0 top
I2CPU31  I2C PU  [SMT-JUMPER_3_2-NC_TRACE_SILK]  45.47,169.93 0 top
I2CPU32  I2C PU  [SMT-JUMPER_3_2-NC_TRACE_SILK]  71.37,169.93 0 top
I2CPU33  I2C PU  [SMT-JUMPER_3_2-NC_TRACE_SILK]  97.28,169.93 0 top
I2CPU34  I2C PU  [SMT-JUMPER_3_2-NC_TRACE_SILK]  123.19,169.93 0 top
J1  I2C  [1X04_NO_SILK]  15.75,8.13 0 top
J2  SPI  [1X06_NO_SILK]  13.21,30.99 0 top
J3  SPI  [1X06_NO_SILK]  39.12,30.99 0 top
J4  QWIIC  [JST04_1MM_RA]  37.85,19.56 270 top
J5  QWIIC  [JST04_1MM_RA]  11.94,19.56 270 top
J6  QWIIC  [JST04_1MM_RA]  53.09,19.56 90 top
J7  QWIIC  [JST04_1MM_RA]  27.18,19.56 90 top
J8  I2C  [1X04_NO_SILK]  41.66,8.13 0 top
J9  SPI  [1X06_NO_SILK]  65.02,30.99 0 top
J10  QWIIC  [JST04_1MM_RA]  63.75,19.56 270 top
J11  QWIIC  [JST04_1MM_RA]  78.99,19.56 90 top
J12  I2C  [1X04_NO_SILK]  67.56,8.13 0 top
J13  SPI  [1X06_NO_SILK]  90.93,30.99 0 top
J14  QWIIC  [JST04_1MM_RA]  89.66,19.56 270 top
J15  QWIIC  [JST04_1MM_RA]  104.9,19.56 90 top
J16  I2C  [1X04_NO_SILK]  93.47,8.13 0 top
J17  SPI  [1X06_NO_SILK]  116.84,30.99 0 top
J18  QWIIC  [JST04_1MM_RA]  115.57,19.56 270 top
J19  QWIIC  [JST04_1MM_RA]  130.81,19.56 90 top
J20  I2C  [1X04_NO_SILK]  119.38,8.13 0 top
J21  SPI  [1X06_NO_SILK]  13.21,56.9 0 top
J22  QWIIC  [JST04_1MM_RA]  11.94,45.47 270 top
J23  QWIIC  [JST04_1MM_RA]  27.18,45.47 90 top
J24  I2C  [1X04_NO_SILK]  15.75,34.04 0 top
J25  SPI  [1X06_NO_SILK]  39.12,56.9 0 top
J26  QWIIC  [JST04_1MM_RA]  37.85,45.47 270 top
J27  QWIIC  [JST04_1MM_RA]  53.09,45.47 90 top
J28  I2C  [1X04_NO_SILK]  41.66,34.04 0 top
J29  SPI  [1X06_NO_SILK]  65.02,56.9 0 top
J30  QWIIC  [JST04_1MM_RA]  63.75,45.47 270 top
J31  QWIIC  [JST04_1MM_RA]  78.99,45.47 90 top
J32  I2C  [1X04_NO_SILK]  67.56,34.04 0 top
J33  SPI  [1X06_NO_SILK]  90.93,56.9 0 top
J34  QWIIC  [JST04_1MM_RA]  89.66,45.47 270 top
J35  QWIIC  [JST04_1MM_RA]  104.9,45.47 90 top
J36  I2C  [1X04_NO_SILK]  93.47,34.04 0 top
J37  SPI  [1X06_NO_SILK]  116.84,56.9 0 top
J38  QWIIC  [JST04_1MM_RA]  115.57,45.47 270 top
J39  QWIIC  [JST04_1MM_RA]  130.81,45.47 90 top
J40  I2C  [1X04_NO_SILK]  119.38,34.04 0 top
J41  SPI  [1X06_NO_SILK]  13.21,82.8 0 top
J42  QWIIC  [JST04_1MM_RA]  11.94,71.37 270 top
J43  QWIIC  [JST04_1MM_RA]  27.18,71.37 90 top
J44  I2C  [1X04_NO_SILK]  15.75,59.94 0 top
J45  SPI  [1X06_NO_SILK]  39.12,82.8 0 top
J46  QWIIC  [JST04_1MM_RA]  37.85,71.37 270 top
J47  QWIIC  [JST04_1MM_RA]  53.09,71.37 90 top
J48  I2C  [1X04_NO_SILK]  41.66,59.94 0 top
J49  SPI  [1X06_NO_SILK]  65.02,82.8 0 top
J50  QWIIC  [JST04_1MM_RA]  63.75,71.37 270 top
J51  QWIIC  [JST04_1MM_RA]  78.99,71.37 90 top
J52  I2C  [1X04_NO_SILK]  67.56,59.94 0 top
J53  SPI  [1X06_NO_SILK]  90.93,82.8 0 top
J54  QWIIC  [JST04_1MM_RA]  89.66,71.37 270 top
J55  QWIIC  [JST04_1MM_RA]  104.9,71.37 90 top
J56  I2C  [1X04_NO_SILK]  93.47,59.94 0 top
J57  SPI  [1X06_NO_SILK]  116.84,82.8 0 top
J58  QWIIC  [JST04_1MM_RA]  115.57,71.37 270 top
J59  QWIIC  [JST04_1MM_RA]  130.81,71.37 90 top
J60  I2C  [1X04_NO_SILK]  119.38,59.94 0 top
J61  SPI  [1X06_NO_SILK]  13.21,108.71 0 top
J62  QWIIC  [JST04_1MM_RA]  11.94,97.28 270 top
J63  QWIIC  [JST04_1MM_RA]  27.18,97.28 90 top
J64  I2C  [1X04_NO_SILK]  15.75,85.85 0 top
J65  SPI  [1X06_NO_SILK]  39.12,108.71 0 top
J66  QWIIC  [JST04_1MM_RA]  37.85,97.28 270 top
J67  QWIIC  [JST04_1MM_RA]  53.09,97.28 90 top
J68  I2C  [1X04_NO_SILK]  41.66,85.85 0 top
J69  SPI  [1X06_NO_SILK]  65.02,108.71 0 top
J70  QWIIC  [JST04_1MM_RA]  63.75,97.28 270 top
J71  QWIIC  [JST04_1MM_RA]  78.99,97.28 90 top
J72  I2C  [1X04_NO_SILK]  67.56,85.85 0 top
J73  SPI  [1X06_NO_SILK]  90.93,108.71 0 top
J74  QWIIC  [JST04_1MM_RA]  89.66,97.28 270 top
J75  QWIIC  [JST04_1MM_RA]  104.9,97.28 90 top
J76  I2C  [1X04_NO_SILK]  93.47,85.85 0 top
J77  SPI  [1X06_NO_SILK]  116.84,108.71 0 top
J78  QWIIC  [JST04_1MM_RA]  115.57,97.28 270 top
J79  QWIIC  [JST04_1MM_RA]  130.81,97.28 90 top
J80  I2C  [1X04_NO_SILK]  119.38,85.85 0 top
J81  SPI  [1X06_NO_SILK]  13.21,134.62 0 top
J82  QWIIC  [JST04_1MM_RA]  11.94,123.19 270 top
J83  QWIIC  [JST04_1MM_RA]  27.18,123.19 90 top
J84  I2C  [1X04_NO_SILK]  15.75,111.76 0 top
J85  SPI  [1X06_NO_SILK]  39.12,134.62 0 top
J86  QWIIC  [JST04_1MM_RA]  37.85,123.19 270 top
J87  QWIIC  [JST04_1MM_RA]  53.09,123.19 90 top
J88  I2C  [1X04_NO_SILK]  41.66,111.76 0 top
J89  SPI  [1X06_NO_SILK]  65.02,134.62 0 top
J90  QWIIC  [JST04_1MM_RA]  63.75,123.19 270 top
J91  QWIIC  [JST04_1MM_RA]  78.99,123.19 90 top
J92  I2C  [1X04_NO_SILK]  67.56,111.76 0 top
J93  SPI  [1X06_NO_SILK]  90.93,134.62 0 top
J94  QWIIC  [JST04_1MM_RA]  89.66,123.19 270 top
J95  QWIIC  [JST04_1MM_RA]  104.9,123.19 90 top
J96  I2C  [1X04_NO_SILK]  93.47,111.76 0 top
J97  SPI  [1X06_NO_SILK]  116.84,134.62 0 top
J98  QWIIC  [JST04_1MM_RA]  115.57,123.19 270 top
J99  QWIIC  [JST04_1MM_RA]  130.81,123.19 90 top
J100  I2C  [1X04_NO_SILK]  119.38,111.76 0 top
J101  SPI  [1X06_NO_SILK]  13.21,160.53 0 top
J102  QWIIC  [JST04_1MM_RA]  11.94,149.1 270 top
J103  QWIIC  [JST04_1MM_RA]  27.18,149.1 90 top
J104  I2C  [1X04_NO_SILK]  15.75,137.67 0 top
J105  SPI  [1X06_NO_SILK]  39.12,160.53 0 top
J106  QWIIC  [JST04_1MM_RA]  37.85,149.1 270 top
J107  QWIIC  [JST04_1MM_RA]  53.09,149.1 90 top
J108  I2C  [1X04_NO_SILK]  41.66,137.67 0 top
J109  SPI  [1X06_NO_SILK]  65.02,160.53 0 top
J110  QWIIC  [JST04_1MM_RA]  63.75,149.1 270 top
J111  QWIIC  [JST04_1MM_RA]  78.99,149.1 90 top
J112  I2C  [1X04_NO_SILK]  67.56,137.67 0 top
J113  SPI  [1X06_NO_SILK]  90.93,160.53 0 top
J114  QWIIC  [JST04_1MM_RA]  89.66,149.1 270 top
J115  QWIIC  [JST04_1MM_RA]  104.9,149.1 90 top
J116  I2C  [1X04_NO_SILK]  93.47,137.67 0 top
J117  SPI  [1X06_NO_SILK]  116.84,160.53 0 top
J118  QWIIC  [JST04_1MM_RA]  115.57,149.1 270 top
J119  QWIIC  [JST04_1MM_RA]  130.81,149.1 90 top
J120  I2C  [1X04_NO_SILK]  119.38,137.67 0 top
J121  SPI  [1X06_NO_SILK]  13.21,186.44 0 top
J122  QWIIC  [JST04_1MM_RA]  11.94,175.01 270 top
J123  QWIIC  [JST04_1MM_RA]  27.18,175.01 90 top
J124  I2C  [1X04_NO_SILK]  15.75,163.58 0 top
J125  SPI  [1X06_NO_SILK]  39.12,186.44 0 top
J126  QWIIC  [JST04_1MM_RA]  37.85,175.01 270 top
J127  QWIIC  [JST04_1MM_RA]  53.09,175.01 90 top
J128  I2C  [1X04_NO_SILK]  41.66,163.58 0 top
J129  SPI  [1X06_NO_SILK]  65.02,186.44 0 top
J130  QWIIC  [JST04_1MM_RA]  63.75,175.01 270 top
J131  QWIIC  [JST04_1MM_RA]  78.99,175.01 90 top
J132  I2C  [1X04_NO_SILK]  67.56,163.58 0 top
J133  SPI  [1X06_NO_SILK]  90.93,186.44 0 top
J134  QWIIC  [JST04_1MM_RA]  89.66,175.01 270 top
J135  QWIIC  [JST04_1MM_RA]  104.9,175.01 90 top
J136  I2C  [1X04_NO_SILK]  93.47,163.58 0 top
J137  SPI  [1X06_NO_SILK]  116.84,186.44 0 top
J138  QWIIC  [JST04_1MM_RA]  115.57,175.01 270 top
J139  QWIIC  [JST04_1MM_RA]  130.81,175.01 90 top
J140  I2C  [1X04_NO_SILK]  119.38,163.58 0 top
LOGO1  OSHW-LOGOMINI  [OSHW-LOGO-MINI]  27.18,8.38 0 bottom
LOGO2  SFE_LOGO_NAME_FLAME.1_INCH  [SFE_LOGO_NAME_FLAME_.1]  19.56,18.29 0 bottom
LOGO3  REVISION  [REVISION]  1.78,-5.84 0 top  (outside the outline)
LOGO4  SFE_LOGO_FLAME.1_INCH  [SFE_LOGO_FLAME_.1]  10.03,25.4 0 top
LOGO5  OSHW-LOGOMINI  [OSHW-LOGO-MINI]  53.09,8.38 0 bottom
LOGO6  REVISION  [REVISION]  27.69,-5.84 0 top  (outside the outline)
LOGO7  SFE_LOGO_NAME_FLAME.1_INCH  [SFE_LOGO_NAME_FLAME_.1]  45.47,18.29 0 bottom
LOGO8  SFE_LOGO_FLAME.1_INCH  [SFE_LOGO_FLAME_.1]  35.94,25.4 0 top
LOGO9  OSHW-LOGOMINI  [OSHW-LOGO-MINI]  78.99,8.38 0 bottom
LOGO10  REVISION  [REVISION]  53.59,-5.84 0 top  (outside the outline)
LOGO11  SFE_LOGO_NAME_FLAME.1_INCH  [SFE_LOGO_NAME_FLAME_.1]  71.37,18.29 0 bottom
LOGO12  SFE_LOGO_FLAME.1_INCH  [SFE_LOGO_FLAME_.1]  61.85,25.4 0 top
LOGO13  OSHW-LOGOMINI  [OSHW-LOGO-MINI]  104.9,8.38 0 bottom
LOGO14  REVISION  [REVISION]  79.5,-5.84 0 top  (outside the outline)
LOGO15  SFE_LOGO_NAME_FLAME.1_INCH  [SFE_LOGO_NAME_FLAME_.1]  97.28,18.29 0 bottom
LOGO16  SFE_LOGO_FLAME.1_INCH  [SFE_LOGO_FLAME_.1]  87.76,25.4 0 top
LOGO17  OSHW-LOGOMINI  [OSHW-LOGO-MINI]  130.81,8.38 0 bottom
LOGO18  REVISION  [REVISION]  105.41,-5.84 0 top  (outside the outline)
LOGO19  SFE_LOGO_NAME_FLAME.1_INCH  [SFE_LOGO_NAME_FLAME_.1]  123.19,18.29 0 bottom
LOGO20  SFE_LOGO_FLAME.1_INCH  [SFE_LOGO_FLAME_.1]  113.67,25.4 0 top
LOGO21  OSHW-LOGOMINI  [OSHW-LOGO-MINI]  27.18,34.29 0 bottom
LOGO22  REVISION  [REVISION]  1.78,20.07 0 top
LOGO23  SFE_LOGO_NAME_FLAME.1_INCH  [SFE_LOGO_NAME_FLAME_.1]  19.56,44.2 0 bottom
LOGO24  SFE_LOGO_FLAME.1_INCH  [SFE_LOGO_FLAME_.1]  10.03,51.31 0 top
LOGO25  OSHW-LOGOMINI  [OSHW-LOGO-MINI]  53.09,34.29 0 bottom
LOGO26  REVISION  [REVISION]  27.69,20.07 0 top
LOGO27  SFE_LOGO_NAME_FLAME.1_INCH  [SFE_LOGO_NAME_FLAME_.1]  45.47,44.2 0 bottom
LOGO28  SFE_LOGO_FLAME.1_INCH  [SFE_LOGO_FLAME_.1]  35.94,51.31 0 top
LOGO29  OSHW-LOGOMINI  [OSHW-LOGO-MINI]  78.99,34.29 0 bottom
LOGO30  REVISION  [REVISION]  53.59,20.07 0 top
LOGO31  SFE_LOGO_NAME_FLAME.1_INCH  [SFE_LOGO_NAME_FLAME_.1]  71.37,44.2 0 bottom
LOGO32  SFE_LOGO_FLAME.1_INCH  [SFE_LOGO_FLAME_.1]  61.85,51.31 0 top
LOGO33  OSHW-LOGOMINI  [OSHW-LOGO-MINI]  104.9,34.29 0 bottom
LOGO34  REVISION  [REVISION]  79.5,20.07 0 top
LOGO35  SFE_LOGO_NAME_FLAME.1_INCH  [SFE_LOGO_NAME_FLAME_.1]  97.28,44.2 0 bottom
LOGO36  SFE_LOGO_FLAME.1_INCH  [SFE_LOGO_FLAME_.1]  87.76,51.31 0 top
LOGO37  OSHW-LOGOMINI  [OSHW-LOGO-MINI]  130.81,34.29 0 bottom
LOGO38  REVISION  [REVISION]  105.41,20.07 0 top
LOGO39  SFE_LOGO_NAME_FLAME.1_INCH  [SFE_LOGO_NAME_FLAME_.1]  123.19,44.2 0 bottom
LOGO40  SFE_LOGO_FLAME.1_INCH  [SFE_LOGO_FLAME_.1]  113.67,51.31 0 top
LOGO41  OSHW-LOGOMINI  [OSHW-LOGO-MINI]  27.18,60.2 0 bottom
LOGO42  REVISION  [REVISION]  1.78,45.97 0 top
LOGO43  SFE_LOGO_NAME_FLAME.1_INCH  [SFE_LOGO_NAME_FLAME_.1]  19.56,70.1 0 bottom
LOGO44  SFE_LOGO_FLAME.1_INCH  [SFE_LOGO_FLAME_.1]  10.03,77.22 0 top
LOGO45  OSHW-LOGOMINI  [OSHW-LOGO-MINI]  53.09,60.2 0 bottom
LOGO46  REVISION  [REVISION]  27.69,45.97 0 top
LOGO47  SFE_LOGO_NAME_FLAME.1_INCH  [SFE_LOGO_NAME_FLAME_.1]  45.47,70.1 0 bottom
LOGO48  SFE_LOGO_FLAME.1_INCH  [SFE_LOGO_FLAME_.1]  35.94,77.22 0 top
LOGO49  OSHW-LOGOMINI  [OSHW-LOGO-MINI]  78.99,60.2 0 bottom
LOGO50  REVISION  [REVISION]  53.59,45.97 0 top
LOGO51  SFE_LOGO_NAME_FLAME.1_INCH  [SFE_LOGO_NAME_FLAME_.1]  71.37,70.1 0 bottom
LOGO52  SFE_LOGO_FLAME.1_INCH  [SFE_LOGO_FLAME_.1]  61.85,77.22 0 top
LOGO53  OSHW-LOGOMINI  [OSHW-LOGO-MINI]  104.9,60.2 0 bottom
LOGO54  REVISION  [REVISION]  79.5,45.97 0 top
LOGO55  SFE_LOGO_NAME_FLAME.1_INCH  [SFE_LOGO_NAME_FLAME_.1]  97.28,70.1 0 bottom
LOGO56  SFE_LOGO_FLAME.1_INCH  [SFE_LOGO_FLAME_.1]  87.76,77.22 0 top
LOGO57  OSHW-LOGOMINI  [OSHW-LOGO-MINI]  130.81,60.2 0 bottom
LOGO58  REVISION  [REVISION]  105.41,45.97 0 top
LOGO59  SFE_LOGO_NAME_FLAME.1_INCH  [SFE_LOGO_NAME_FLAME_.1]  123.19,70.1 0 bottom
LOGO60  SFE_LOGO_FLAME.1_INCH  [SFE_LOGO_FLAME_.1]  113.67,77.22 0 top
LOGO61  OSHW-LOGOMINI  [OSHW-LOGO-MINI]  27.18,86.11 0 bottom
LOGO62  REVISION  [REVISION]  1.78,71.88 0 top
LOGO63  SFE_LOGO_NAME_FLAME.1_INCH  [SFE_LOGO_NAME_FLAME_.1]  19.56,96.01 0 bottom
LOGO64  SFE_LOGO_FLAME.1_INCH  [SFE_LOGO_FLAME_.1]  10.03,103.12 0 top
LOGO65  OSHW-LOGOMINI  [OSHW-LOGO-MINI]  53.09,86.11 0 bottom
LOGO66  REVISION  [REVISION]  27.69,71.88 0 top
LOGO67  SFE_LOGO_NAME_FLAME.1_INCH  [SFE_LOGO_NAME_FLAME_.1]  45.47,96.01 0 bottom
LOGO68  SFE_LOGO_FLAME.1_INCH  [SFE_LOGO_FLAME_.1]  35.94,103.12 0 top
LOGO69  OSHW-LOGOMINI  [OSHW-LOGO-MINI]  78.99,86.11 0 bottom
LOGO70  REVISION  [REVISION]  53.59,71.88 0 top
LOGO71  SFE_LOGO_NAME_FLAME.1_INCH  [SFE_LOGO_NAME_FLAME_.1]  71.37,96.01 0 bottom
LOGO72  SFE_LOGO_FLAME.1_INCH  [SFE_LOGO_FLAME_.1]  61.85,103.12 0 top
LOGO73  OSHW-LOGOMINI  [OSHW-LOGO-MINI]  104.9,86.11 0 bottom
LOGO74  REVISION  [REVISION]  79.5,71.88 0 top
LOGO75  SFE_LOGO_NAME_FLAME.1_INCH  [SFE_LOGO_NAME_FLAME_.1]  97.28,96.01 0 bottom
LOGO76  SFE_LOGO_FLAME.1_INCH  [SFE_LOGO_FLAME_.1]  87.76,103.12 0 top
LOGO77  OSHW-LOGOMINI  [OSHW-LOGO-MINI]  130.81,86.11 0 bottom
LOGO78  REVISION  [REVISION]  105.41,71.88 0 top
LOGO79  SFE_LOGO_NAME_FLAME.1_INCH  [SFE_LOGO_NAME_FLAME_.1]  123.19,96.01 0 bottom
LOGO80  SFE_LOGO_FLAME.1_INCH  [SFE_LOGO_FLAME_.1]  113.67,103.12 0 top
LOGO81  OSHW-LOGOMINI  [OSHW-LOGO-MINI]  27.18,112.01 0 bottom
LOGO82  REVISION  [REVISION]  1.78,97.79 0 top
LOGO83  SFE_LOGO_NAME_FLAME.1_INCH  [SFE_LOGO_NAME_FLAME_.1]  19.56,121.92 0 bottom
LOGO84  SFE_LOGO_FLAME.1_INCH  [SFE_LOGO_FLAME_.1]  10.03,129.03 0 top
LOGO85  OSHW-LOGOMINI  [OSHW-LOGO-MINI]  53.09,112.01 0 bottom
LOGO86  REVISION  [REVISION]  27.69,97.79 0 top
LOGO87  SFE_LOGO_NAME_FLAME.1_INCH  [SFE_LOGO_NAME_FLAME_.1]  45.47,121.92 0 bottom
LOGO88  SFE_LOGO_FLAME.1_INCH  [SFE_LOGO_FLAME_.1]  35.94,129.03 0 top
LOGO89  OSHW-LOGOMINI  [OSHW-LOGO-MINI]  78.99,112.01 0 bottom
LOGO90  REVISION  [REVISION]  53.59,97.79 0 top
LOGO91  SFE_LOGO_NAME_FLAME.1_INCH  [SFE_LOGO_NAME_FLAME_.1]  71.37,121.92 0 bottom
LOGO92  SFE_LOGO_FLAME.1_INCH  [SFE_LOGO_FLAME_.1]  61.85,129.03 0 top
LOGO93  OSHW-LOGOMINI  [OSHW-LOGO-MINI]  104.9,112.01 0 bottom
LOGO94  REVISION  [REVISION]  79.5,97.79 0 top
LOGO95  SFE_LOGO_NAME_FLAME.1_INCH  [SFE_LOGO_NAME_FLAME_.1]  97.28,121.92 0 bottom
LOGO96  SFE_LOGO_FLAME.1_INCH  [SFE_LOGO_FLAME_.1]  87.76,129.03 0 top
LOGO97  OSHW-LOGOMINI  [OSHW-LOGO-MINI]  130.81,112.01 0 bottom
LOGO98  REVISION  [REVISION]  105.41,97.79 0 top
LOGO99  SFE_LOGO_NAME_FLAME.1_INCH  [SFE_LOGO_NAME_FLAME_.1]  123.19,121.92 0 bottom
LOGO100  SFE_LOGO_FLAME.1_INCH  [SFE_LOGO_FLAME_.1]  113.67,129.03 0 top
LOGO101  OSHW-LOGOMINI  [OSHW-LOGO-MINI]  27.18,137.92 0 bottom
LOGO102  REVISION  [REVISION]  1.78,123.7 0 top
LOGO103  SFE_LOGO_NAME_FLAME.1_INCH  [SFE_LOGO_NAME_FLAME_.1]  19.56,147.83 0 bottom
LOGO104  SFE_LOGO_FLAME.1_INCH  [SFE_LOGO_FLAME_.1]  10.03,154.94 0 top
LOGO105  OSHW-LOGOMINI  [OSHW-LOGO-MINI]  53.09,137.92 0 bottom
LOGO106  REVISION  [REVISION]  27.69,123.7 0 top
LOGO107  SFE_LOGO_NAME_FLAME.1_INCH  [SFE_LOGO_NAME_FLAME_.1]  45.47,147.83 0 bottom
LOGO108  SFE_LOGO_FLAME.1_INCH  [SFE_LOGO_FLAME_.1]  35.94,154.94 0 top
LOGO109  OSHW-LOGOMINI  [OSHW-LOGO-MINI]  78.99,137.92 0 bottom
LOGO110  REVISION  [REVISION]  53.59,123.7 0 top
LOGO111  SFE_LOGO_NAME_FLAME.1_INCH  [SFE_LOGO_NAME_FLAME_.1]  71.37,147.83 0 bottom
LOGO112  SFE_LOGO_FLAME.1_INCH  [SFE_LOGO_FLAME_.1]  61.85,154.94 0 top
LOGO113  OSHW-LOGOMINI  [OSHW-LOGO-MINI]  104.9,137.92 0 bottom
LOGO114  REVISION  [REVISION]  79.5,123.7 0 top
LOGO115  SFE_LOGO_NAME_FLAME.1_INCH  [SFE_LOGO_NAME_FLAME_.1]  97.28,147.83 0 bottom
LOGO116  SFE_LOGO_FLAME.1_INCH  [SFE_LOGO_FLAME_.1]  87.76,154.94 0 top
LOGO117  OSHW-LOGOMINI  [OSHW-LOGO-MINI]  130.81,137.92 0 bottom
LOGO118  REVISION  [REVISION]  105.41,123.7 0 top
LOGO119  SFE_LOGO_NAME_FLAME.1_INCH  [SFE_LOGO_NAME_FLAME_.1]  123.19,147.83 0 bottom
LOGO120  SFE_LOGO_FLAME.1_INCH  [SFE_LOGO_FLAME_.1]  113.67,154.94 0 top
LOGO121  OSHW-LOGOMINI  [OSHW-LOGO-MINI]  27.18,163.83 0 bottom
LOGO122  REVISION  [REVISION]  1.78,149.61 0 top
LOGO123  SFE_LOGO_NAME_FLAME.1_INCH  [SFE_LOGO_NAME_FLAME_.1]  19.56,173.74 0 bottom
LOGO124  SFE_LOGO_FLAME.1_INCH  [SFE_LOGO_FLAME_.1]  10.03,180.85 0 top
LOGO125  OSHW-LOGOMINI  [OSHW-LOGO-MINI]  53.09,163.83 0 bottom
LOGO126  REVISION  [REVISION]  27.69,149.61 0 top
LOGO127  SFE_LOGO_NAME_FLAME.1_INCH  [SFE_LOGO_NAME_FLAME_.1]  45.47,173.74 0 bottom
LOGO128  SFE_LOGO_FLAME.1_INCH  [SFE_LOGO_FLAME_.1]  35.94,180.85 0 top
LOGO129  OSHW-LOGOMINI  [OSHW-LOGO-MINI]  78.99,163.83 0 bottom
LOGO130  REVISION  [REVISION]  53.59,149.61 0 top
LOGO131  SFE_LOGO_NAME_FLAME.1_INCH  [SFE_LOGO_NAME_FLAME_.1]  71.37,173.74 0 bottom
LOGO132  SFE_LOGO_FLAME.1_INCH  [SFE_LOGO_FLAME_.1]  61.85,180.85 0 top
LOGO133  OSHW-LOGOMINI  [OSHW-LOGO-MINI]  104.9,163.83 0 bottom
LOGO134  REVISION  [REVISION]  79.5,149.61 0 top
LOGO135  SFE_LOGO_NAME_FLAME.1_INCH  [SFE_LOGO_NAME_FLAME_.1]  97.28,173.74 0 bottom
LOGO136  SFE_LOGO_FLAME.1_INCH  [SFE_LOGO_FLAME_.1]  87.76,180.85 0 top
LOGO137  OSHW-LOGOMINI  [OSHW-LOGO-MINI]  130.81,163.83 0 bottom
LOGO138  REVISION  [REVISION]  105.41,149.61 0 top
LOGO139  SFE_LOGO_NAME_FLAME.1_INCH  [SFE_LOGO_NAME_FLAME_.1]  123.19,173.74 0 bottom
LOGO140  SFE_LOGO_FLAME.1_INCH  [SFE_LOGO_FLAME_.1]  113.67,180.85 0 top
PWRLED  JUMPER-SMT_2_NC_TRACE_SILK  [SMT-JUMPER_2_NC_TRACE_SILK]  29.72,9.4 270 top
PWRLED1  JUMPER-SMT_2_NC_TRACE_SILK  [SMT-JUMPER_2_NC_TRACE_SILK]  55.63,9.4 270 top
PWRLED2  JUMPER-SMT_2_NC_TRACE_SILK  [SMT-JUMPER_2_NC_TRACE_SILK]  81.53,9.4 270 top
PWRLED3  JUMPER-SMT_2_NC_TRACE_SILK  [SMT-JUMPER_2_NC_TRACE_SILK]  107.44,9.4 270 top
PWRLED4  JUMPER-SMT_2_NC_TRACE_SILK  [SMT-JUMPER_2_NC_TRACE_SILK]  133.35,9.4 270 top
PWRLED5  JUMPER-SMT_2_NC_TRACE_SILK  [SMT-JUMPER_2_NC_TRACE_SILK]  29.72,35.31 270 top
PWRLED6  JUMPER-SMT_2_NC_TRACE_SILK  [SMT-JUMPER_2_NC_TRACE_SILK]  55.63,35.31 270 top
PWRLED7  JUMPER-SMT_2_NC_TRACE_SILK  [SMT-JUMPER_2_NC_TRACE_SILK]  81.53,35.31 270 top
PWRLED8  JUMPER-SMT_2_NC_TRACE_SILK  [SMT-JUMPER_2_NC_TRACE_SILK]  107.44,35.31 270 top
PWRLED9  JUMPER-SMT_2_NC_TRACE_SILK  [SMT-JUMPER_2_NC_TRACE_SILK]  133.35,35.31 270 top
PWRLED10  JUMPER-SMT_2_NC_TRACE_SILK  [SMT-JUMPER_2_NC_TRACE_SILK]  29.72,61.21 270 top
PWRLED11  JUMPER-SMT_2_NC_TRACE_SILK  [SMT-JUMPER_2_NC_TRACE_SILK]  55.63,61.21 270 top
PWRLED12  JUMPER-SMT_2_NC_TRACE_SILK  [SMT-JUMPER_2_NC_TRACE_SILK]  81.53,61.21 270 top
PWRLED13  JUMPER-SMT_2_NC_TRACE_SILK  [SMT-JUMPER_2_NC_TRACE_SILK]  107.44,61.21 270 top
PWRLED14  JUMPER-SMT_2_NC_TRACE_SILK  [SMT-JUMPER_2_NC_TRACE_SILK]  133.35,61.21 270 top
PWRLED15  JUMPER-SMT_2_NC_TRACE_SILK  [SMT-JUMPER_2_NC_TRACE_SILK]  29.72,87.12 270 top
PWRLED16  JUMPER-SMT_2_NC_TRACE_SILK  [SMT-JUMPER_2_NC_TRACE_SILK]  55.63,87.12 270 top
PWRLED17  JUMPER-SMT_2_NC_TRACE_SILK  [SMT-JUMPER_2_NC_TRACE_SILK]  81.53,87.12 270 top
PWRLED18  JUMPER-SMT_2_NC_TRACE_SILK  [SMT-JUMPER_2_NC_TRACE_SILK]  107.44,87.12 270 top
PWRLED19  JUMPER-SMT_2_NC_TRACE_SILK  [SMT-JUMPER_2_NC_TRACE_SILK]  133.35,87.12 270 top
PWRLED20  JUMPER-SMT_2_NC_TRACE_SILK  [SMT-JUMPER_2_NC_TRACE_SILK]  29.72,113.03 270 top
PWRLED21  JUMPER-SMT_2_NC_TRACE_SILK  [SMT-JUMPER_2_NC_TRACE_SILK]  55.63,113.03 270 top
PWRLED22  JUMPER-SMT_2_NC_TRACE_SILK  [SMT-JUMPER_2_NC_TRACE_SILK]  81.53,113.03 270 top
PWRLED23  JUMPER-SMT_2_NC_TRACE_SILK  [SMT-JUMPER_2_NC_TRACE_SILK]  107.44,113.03 270 top
PWRLED24  JUMPER-SMT_2_NC_TRACE_SILK  [SMT-JUMPER_2_NC_TRACE_SILK]  133.35,113.03 270 top
PWRLED25  JUMPER-SMT_2_NC_TRACE_SILK  [SMT-JUMPER_2_NC_TRACE_SILK]  29.72,138.94 270 top
PWRLED26  JUMPER-SMT_2_NC_TRACE_SILK  [SMT-JUMPER_2_NC_TRACE_SILK]  55.63,138.94 270 top
PWRLED27  JUMPER-SMT_2_NC_TRACE_SILK  [SMT-JUMPER_2_NC_TRACE_SILK]  81.53,138.94 270 top
PWRLED28  JUMPER-SMT_2_NC_TRACE_SILK  [SMT-JUMPER_2_NC_TRACE_SILK]  107.44,138.94 270 top
PWRLED29  JUMPER-SMT_2_NC_TRACE_SILK  [SMT-JUMPER_2_NC_TRACE_SILK]  133.35,138.94 270 top
PWRLED30  JUMPER-SMT_2_NC_TRACE_SILK  [SMT-JUMPER_2_NC_TRACE_SILK]  29.72,164.85 270 top
PWRLED31  JUMPER-SMT_2_NC_TRACE_SILK  [SMT-JUMPER_2_NC_TRACE_SILK]  55.63,164.85 270 top
PWRLED32  JUMPER-SMT_2_NC_TRACE_SILK  [SMT-JUMPER_2_NC_TRACE_SILK]  81.53,164.85 270 top
PWRLED33  JUMPER-SMT_2_NC_TRACE_SILK  [SMT-JUMPER_2_NC_TRACE_SILK]  107.44,164.85 270 top
PWRLED34  JUMPER-SMT_2_NC_TRACE_SILK  [SMT-JUMPER_2_NC_TRACE_SILK]  133.35,164.85 270 top
R1  4.7k  [0603@1]  23.37,23.37 0 top
R2  1k  [0603]  29.72,11.56 0 top
R3  4.7k  [0603@1]  23.37,14.48 180 top
R4  4.7k  [0603@1]  15.75,14.48 0 top
R5  4.7k  [0603@1]  15.75,23.37 0 top
R6  4.7k  [0603@1]  49.28,23.37 0 top
R7  4.7k  [0603@1]  49.28,14.48 180 top
R8  4.7k  [0603@1]  41.66,14.48 0 top
R9  4.7k  [0603@1]  41.66,23.37 0 top
R10  1k  [0603]  55.63,11.56 0 top
R11  4.7k  [0603@1]  75.18,23.37 0 top
R12  4.7k  [0603@1]  75.18,14.48 180 top
R13  4.7k  [0603@1]  67.56,14.48 0 top
R14  4.7k  [0603@1]  67.56,23.37 0 top
R15  1k  [0603]  81.53,11.56 0 top
R16  4.7k  [0603@1]  101.09,23.37 0 top
R17  4.7k  [0603@1]  101.09,14.48 180 top
R18  4.7k  [0603@1]  93.47,14.48 0 top
R19  4.7k  [0603@1]  93.47,23.37 0 top
R20  1k  [0603]  107.44,11.56 0 top
R21  4.7k  [0603@1]  127,23.37 0 top
R22  4.7k  [0603@1]  127,14.48 180 top
R23  4.7k  [0603@1]  119.38,14.48 0 top
R24  4.7k  [0603@1]  119.38,23.37 0 top
R25  1k  [0603]  133.35,11.56 0 top
R26  4.7k  [0603@1]  23.37,49.28 0 top
R27  4.7k  [0603@1]  23.37,40.39 180 top
R28  4.7k  [0603@1]  15.75,40.39 0 top
R29  4.7k  [0603@1]  15.75,49.28 0 top
R30  1k  [0603]  29.72,37.46 0 top
R31  4.7k  [0603@1]  49.28,49.28 0 top
R32  4.7k  [0603@1]  49.28,40.39 180 top
R33  4.7k  [0603@1]  41.66,40.39 0 top
R34  4.7k  [0603@1]  41.66,49.28 0 top
R35  1k  [0603]  55.63,37.46 0 top
R36  4.7k  [0603@1]  75.18,49.28 0 top
R37  4.7k  [0603@1]  75.18,40.39 180 top
R38  4.7k  [0603@1]  67.56,40.39 0 top
R39  4.7k  [0603@1]  67.56,49.28 0 top
R40  1k  [0603]  81.53,37.46 0 top
R41  4.7k  [0603@1]  101.09,49.28 0 top
R42  4.7k  [0603@1]  101.09,40.39 180 top
R43  4.7k  [0603@1]  93.47,40.39 0 top
R44  4.7k  [0603@1]  93.47,49.28 0 top
R45  1k  [0603]  107.44,37.46 0 top
R46  4.7k  [0603@1]  127,49.28 0 top
R47  4.7k  [0603@1]  127,40.39 180 top
R48  4.7k  [0603@1]  119.38,40.39 0 top
R49  4.7k  [0603@1]  119.38,49.28 0 top
R50  1k  [0603]  133.35,37.46 0 top
R51  4.7k  [0603@1]  23.37,75.18 0 top
R52  4.7k  [0603@1]  23.37,66.29 180 top
R53  4.7k  [0603@1]  15.75,66.29 0 top
R54  4.7k  [0603@1]  15.75,75.18 0 top
R55  1k  [0603]  29.72,63.37 0 top
R56  4.7k  [0603@1]  49.28,75.18 0 top
R57  4.7k  [0603@1]  49.28,66.29 180 top
R58  4.7k  [0603@1]  41.66,66.29 0 top
R59  4.7k  [0603@1]  41.66,75.18 0 top
R60  1k  [0603]  55.63,63.37 0 top
R61  4.7k  [0603@1]  75.18,75.18 0 top
R62  4.7k  [0603@1]  75.18,66.29 180 top
R63  4.7k  [0603@1]  67.56,66.29 0 top
R64  4.7k  [0603@1]  67.56,75.18 0 top
R65  1k  [0603]  81.53,63.37 0 top
R66  4.7k  [0603@1]  101.09,75.18 0 top
R67  4.7k  [0603@1]  101.09,66.29 180 top
R68  4.7k  [0603@1]  93.47,66.29 0 top
R69  4.7k  [0603@1]  93.47,75.18 0 top
R70  1k  [0603]  107.44,63.37 0 top
R71  4.7k  [0603@1]  127,75.18 0 top
R72  4.7k  [0603@1]  127,66.29 180 top
R73  4.7k  [0603@1]  119.38,66.29 0 top
R74  4.7k  [0603@1]  119.38,75.18 0 top
R75  1k  [0603]  133.35,63.37 0 top
R76  4.7k  [0603@1]  23.37,101.09 0 top
R77  4.7k  [0603@1]  23.37,92.2 180 top
R78  4.7k  [0603@1]  15.75,92.2 0 top
R79  4.7k  [0603@1]  15.75,101.09 0 top
R80  1k  [0603]  29.72,89.28 0 top
R81  4.7k  [0603@1]  49.28,101.09 0 top
R82  4.7k  [0603@1]  49.28,92.2 180 top
R83  4.7k  [0603@1]  41.66,92.2 0 top
R84  4.7k  [0603@1]  41.66,101.09 0 top
R85  1k  [0603]  55.63,89.28 0 top
R86  4.7k  [0603@1]  75.18,101.09 0 top
R87  4.7k  [0603@1]  75.18,92.2 180 top
R88  4.7k  [0603@1]  67.56,92.2 0 top
R89  4.7k  [0603@1]  67.56,101.09 0 top
R90  1k  [0603]  81.53,89.28 0 top
R91  4.7k  [0603@1]  101.09,101.09 0 top
R92  4.7k  [0603@1]  101.09,92.2 180 top
R93  4.7k  [0603@1]  93.47,92.2 0 top
R94  4.7k  [0603@1]  93.47,101.09 0 top
R95  1k  [0603]  107.44,89.28 0 top
R96  4.7k  [0603@1]  127,101.09 0 top
R97  4.7k  [0603@1]  127,92.2 180 top
R98  4.7k  [0603@1]  119.38,92.2 0 top
R99  4.7k  [0603@1]  119.38,101.09 0 top
R100  1k  [0603]  133.35,89.28 0 top
R101  4.7k  [0603@1]  23.37,127 0 top
R102  4.7k  [0603@1]  23.37,118.11 180 top
R103  4.7k  [0603@1]  15.75,118.11 0 top
R104  4.7k  [0603@1]  15.75,127 0 top
R105  1k  [0603]  29.72,115.19 0 top
R106  4.7k  [0603@1]  49.28,127 0 top
R107  4.7k  [0603@1]  49.28,118.11 180 top
R108  4.7k  [0603@1]  41.66,118.11 0 top
R109  4.7k  [0603@1]  41.66,127 0 top
R110  1k  [0603]  55.63,115.19 0 top
R111  4.7k  [0603@1]  75.18,127 0 top
R112  4.7k  [0603@1]  75.18,118.11 180 top
R113  4.7k  [0603@1]  67.56,118.11 0 top
R114  4.7k  [0603@1]  67.56,127 0 top
R115  1k  [0603]  81.53,115.19 0 top
R116  4.7k  [0603@1]  101.09,127 0 top
R117  4.7k  [0603@1]  101.09,118.11 180 top
R118  4.7k  [0603@1]  93.47,118.11 0 top
R119  4.7k  [0603@1]  93.47,127 0 top
R120  1k  [0603]  107.44,115.19 0 top
R121  4.7k  [0603@1]  127,127 0 top
R122  4.7k  [0603@1]  127,118.11 180 top
R123  4.7k  [0603@1]  119.38,118.11 0 top
R124  4.7k  [0603@1]  119.38,127 0 top
R125  1k  [0603]  133.35,115.19 0 top
R126  4.7k  [0603@1]  23.37,152.91 0 top
R127  4.7k  [0603@1]  23.37,144.02 180 top
R128  4.7k  [0603@1]  15.75,144.02 0 top
R129  4.7k  [0603@1]  15.75,152.91 0 top
R130  1k  [0603]  29.72,141.1 0 top
R131  4.7k  [0603@1]  49.28,152.91 0 top
R132  4.7k  [0603@1]  49.28,144.02 180 top
R133  4.7k  [0603@1]  41.66,144.02 0 top
R134  4.7k  [0603@1]  41.66,152.91 0 top
R135  1k  [0603]  55.63,141.1 0 top
R136  4.7k  [0603@1]  75.18,152.91 0 top
R137  4.7k  [0603@1]  75.18,144.02 180 top
R138  4.7k  [0603@1]  67.56,144.02 0 top
R139  4.7k  [0603@1]  67.56,152.91 0 top
R140  1k  [0603]  81.53,141.1 0 top
R141  4.7k  [0603@1]  101.09,152.91 0 top
R142  4.7k  [0603@1]  101.09,144.02 180 top
R143  4.7k  [0603@1]  93.47,144.02 0 top
R144  4.7k  [0603@1]  93.47,152.91 0 top
R145  1k  [0603]  107.44,141.1 0 top
R146  4.7k  [0603@1]  127,152.91 0 top
R147  4.7k  [0603@1]  127,144.02 180 top
R148  4.7k  [0603@1]  119.38,144.02 0 top
R149  4.7k  [0603@1]  119.38,152.91 0 top
R150  1k  [0603]  133.35,141.1 0 top
R151  4.7k  [0603@1]  23.37,178.82 0 top
R152  4.7k  [0603@1]  23.37,169.93 180 top
R153  4.7k  [0603@1]  15.75,169.93 0 top
R154  4.7k  [0603@1]  15.75,178.82 0 top
R155  1k  [0603]  29.72,167 0 top
R156  4.7k  [0603@1]  49.28,178.82 0 top
R157  4.7k  [0603@1]  49.28,169.93 180 top
R158  4.7k  [0603@1]  41.66,169.93 0 top
R159  4.7k  [0603@1]  41.66,178.82 0 top
R160  1k  [0603]  55.63,167 0 top
R161  4.7k  [0603@1]  75.18,178.82 0 top
R162  4.7k  [0603@1]  75.18,169.93 180 top
R163  4.7k  [0603@1]  67.56,169.93 0 top
R164  4.7k  [0603@1]  67.56,178.82 0 top
R165  1k  [0603]  81.53,167 0 top
R166  4.7k  [0603@1]  101.09,178.82 0 top
R167  4.7k  [0603@1]  101.09,169.93 180 top
R168  4.7k  [0603@1]  93.47,169.93 0 top
R169  4.7k  [0603@1]  93.47,178.82 0 top
R170  1k  [0603]  107.44,167 0 top
R171  4.7k  [0603@1]  127,178.82 0 top
R172  4.7k  [0603@1]  127,169.93 180 top
R173  4.7k  [0603@1]  119.38,169.93 0 top